# Altium PCB STM32F407_board.PcbDoc (part 1 of 3)
Units mm, origin at the board's own origin, x right, y up, seen from the top; angles counter-clockwise.
Board outline 72.6 x 74.6 mm, 4 copper layers (Top Layer, GND, PWR, Bottom Layer), stack 1.564 mm thick; 188 components, 143 nets, 738 pads, 406 vias.
Unrouted connection lines stored in the file: 4.
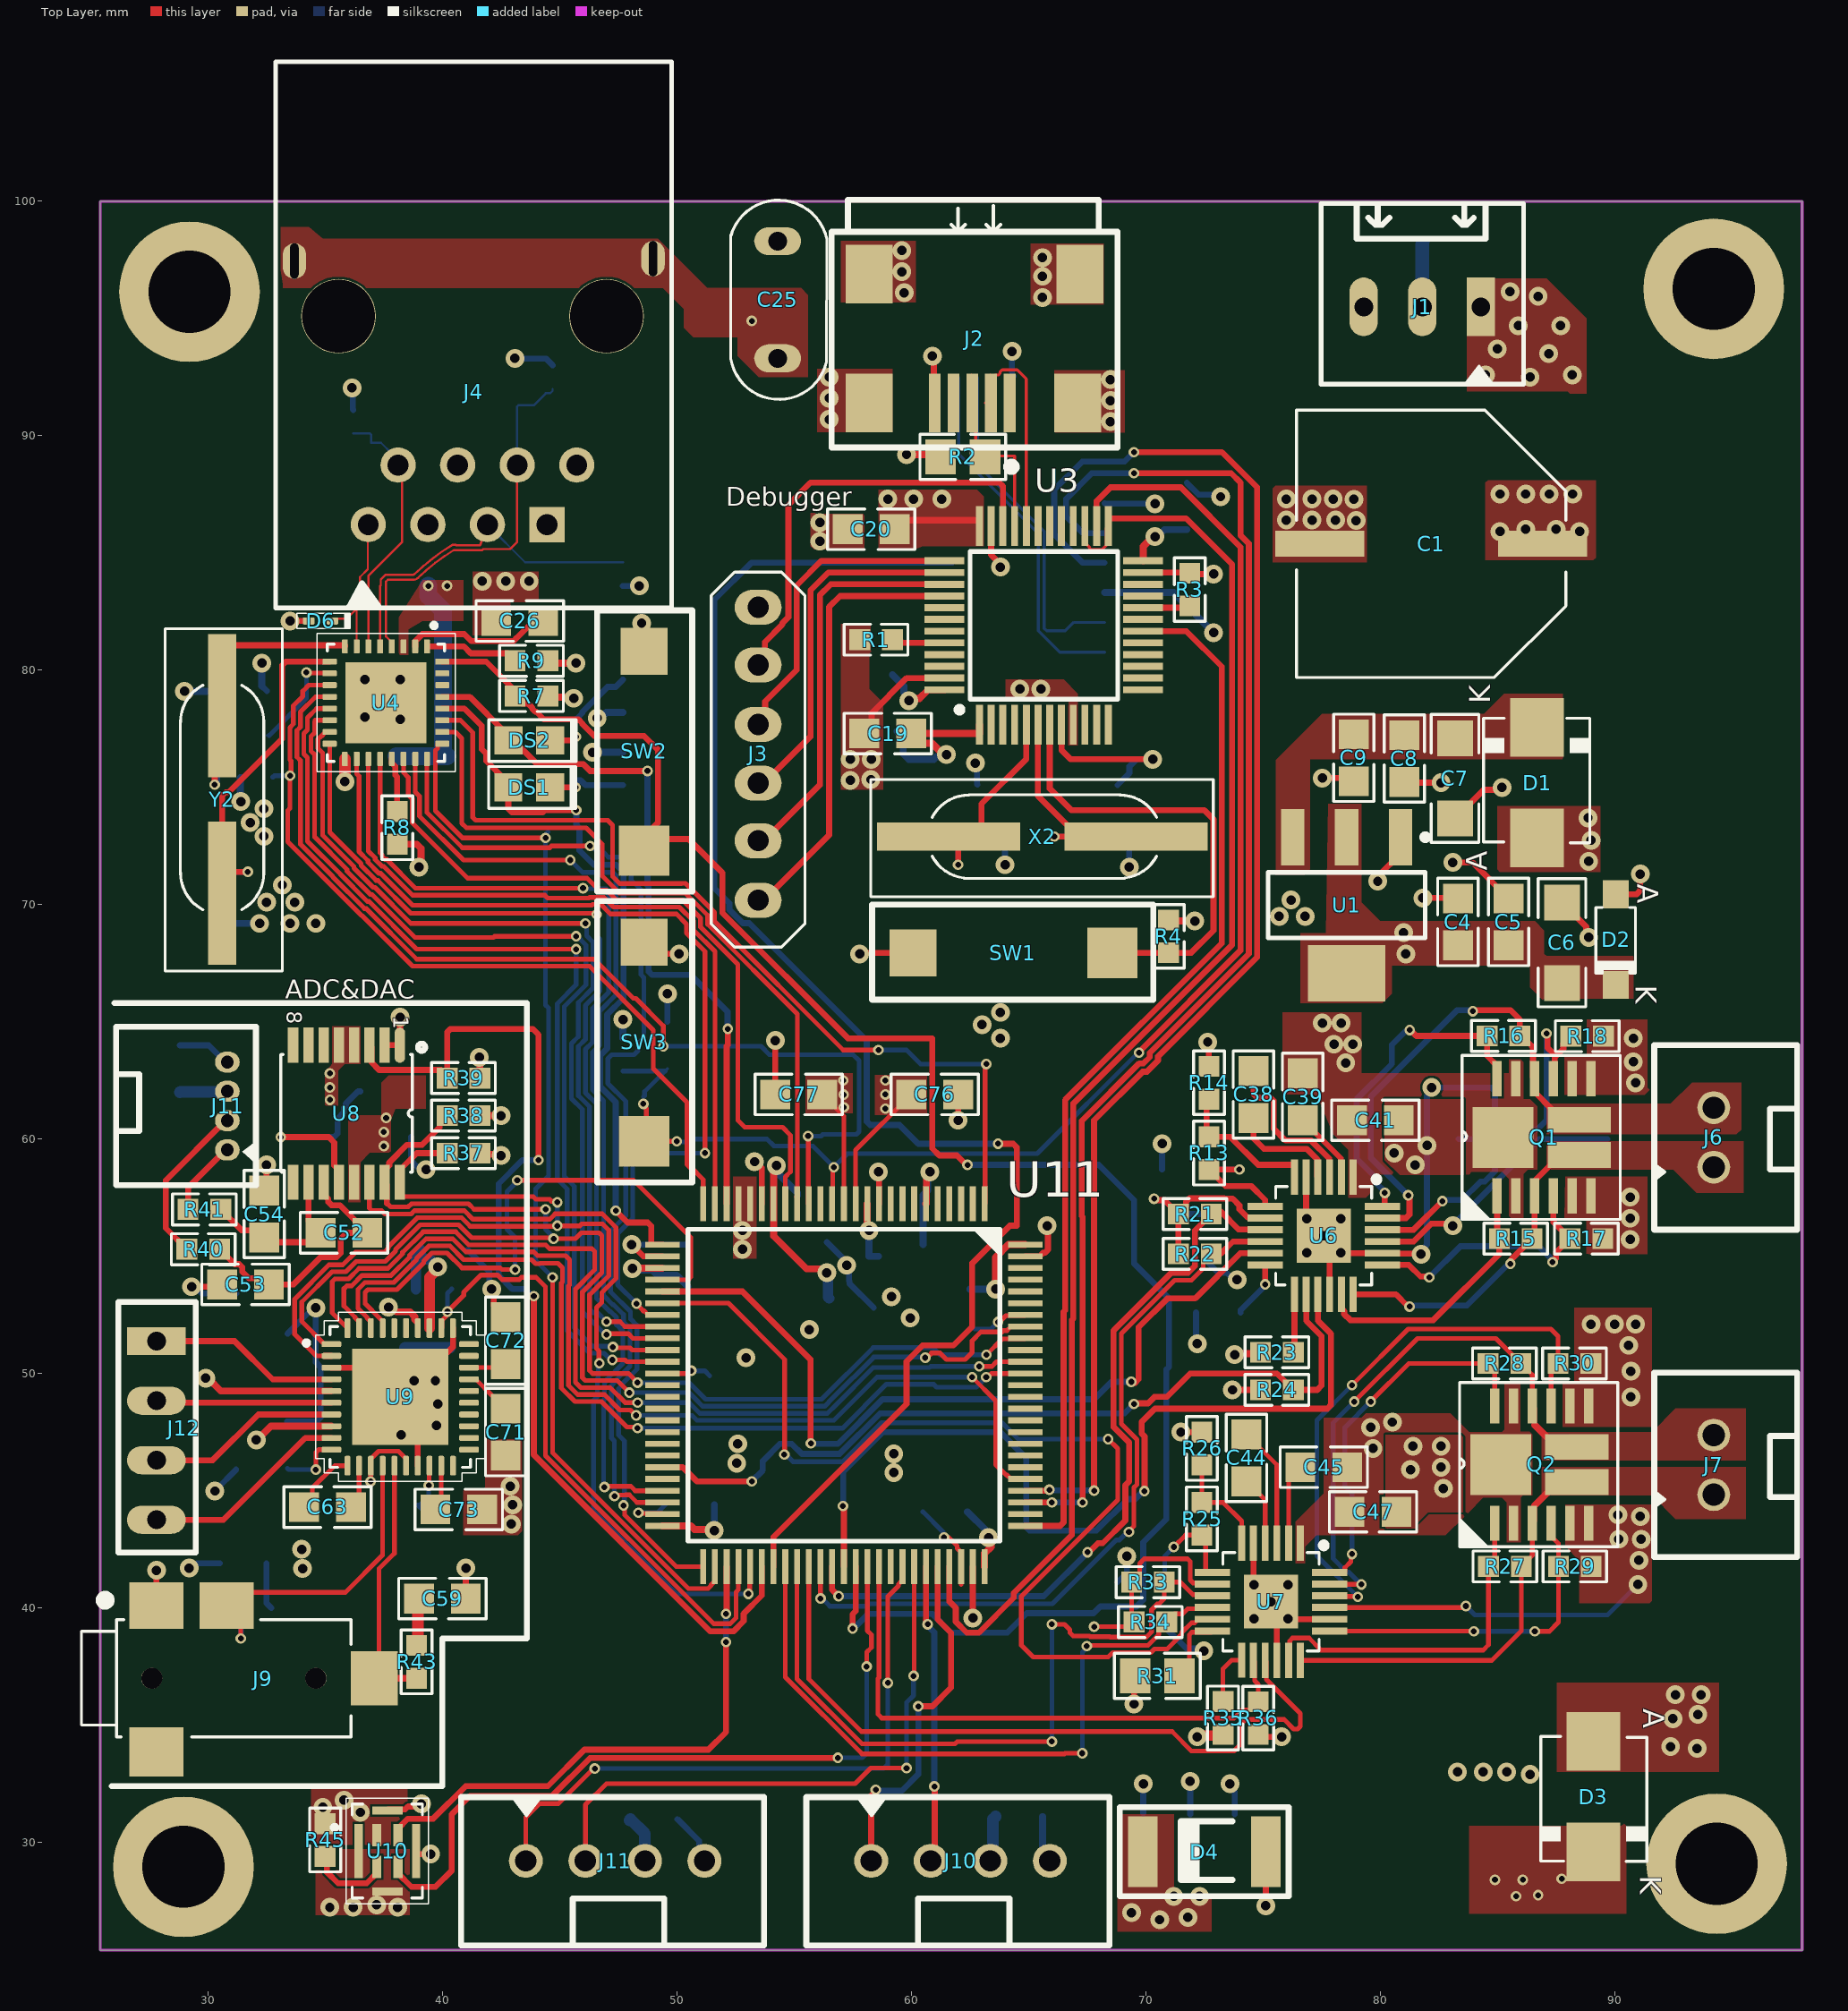
[diagram p0: Top Layer view]
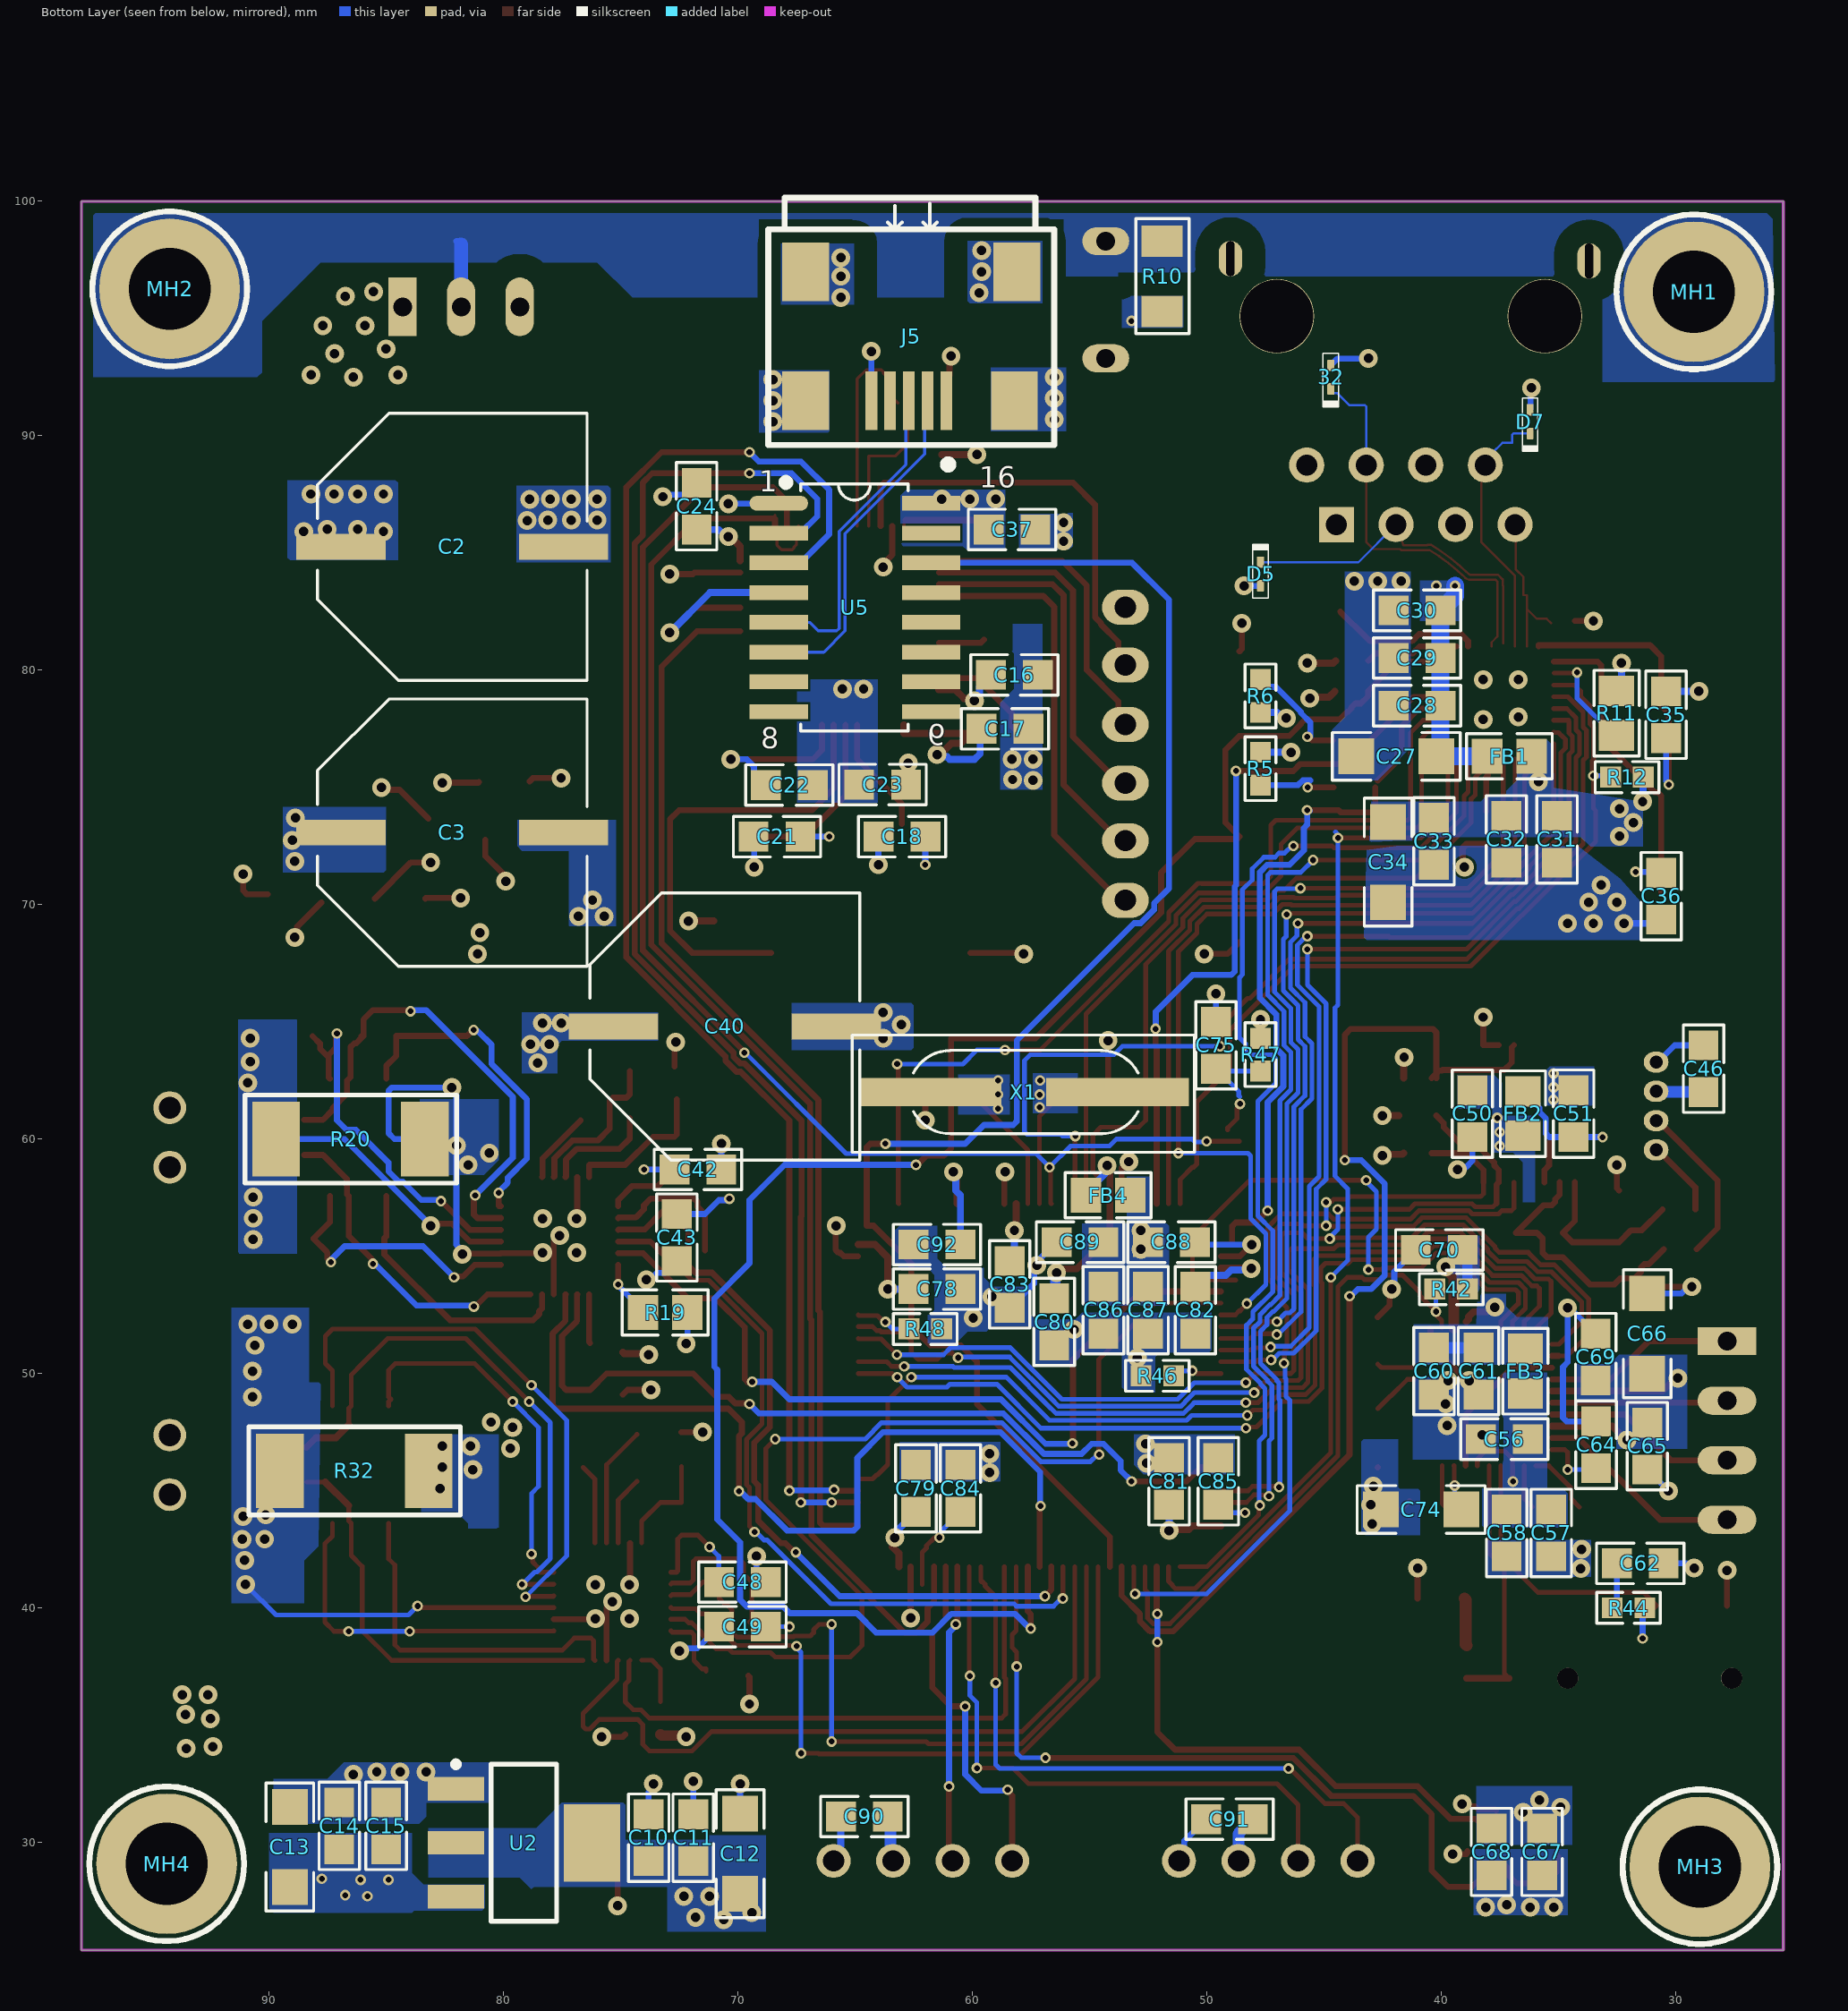
[diagram p1: Bottom Layer view, seen from below]
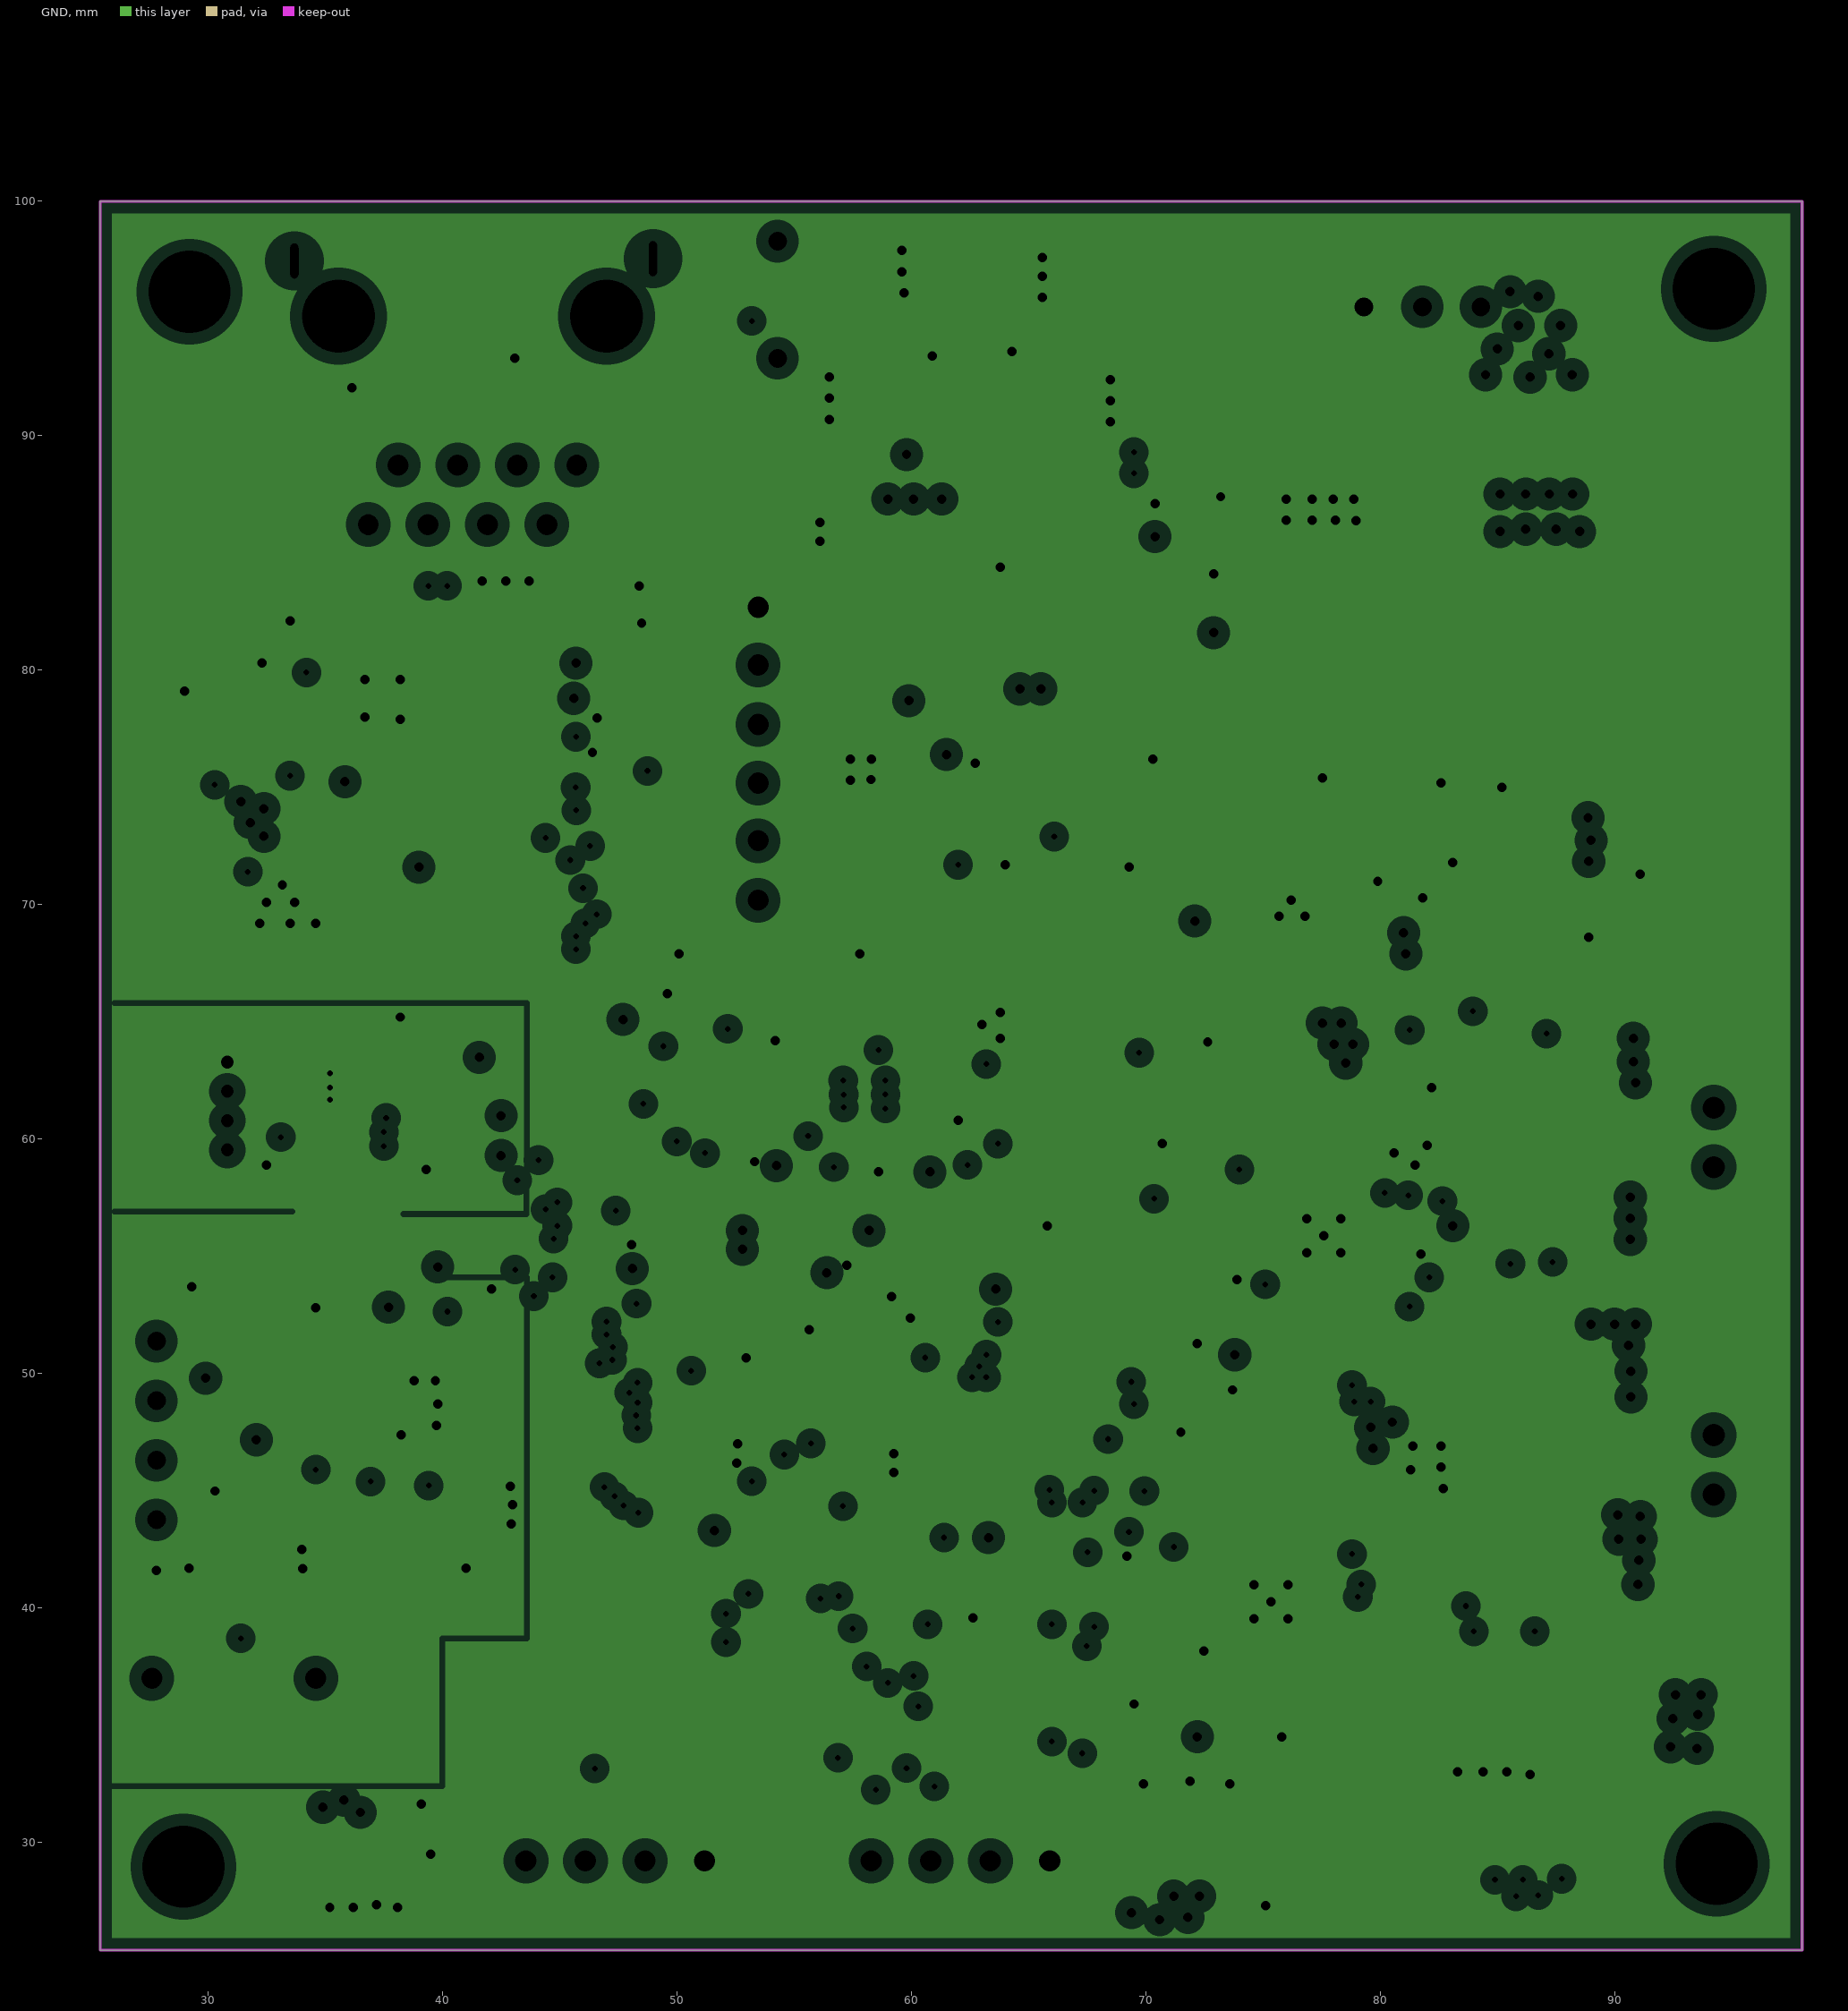
[diagram p2: GND, clearances drawn from the general rule]
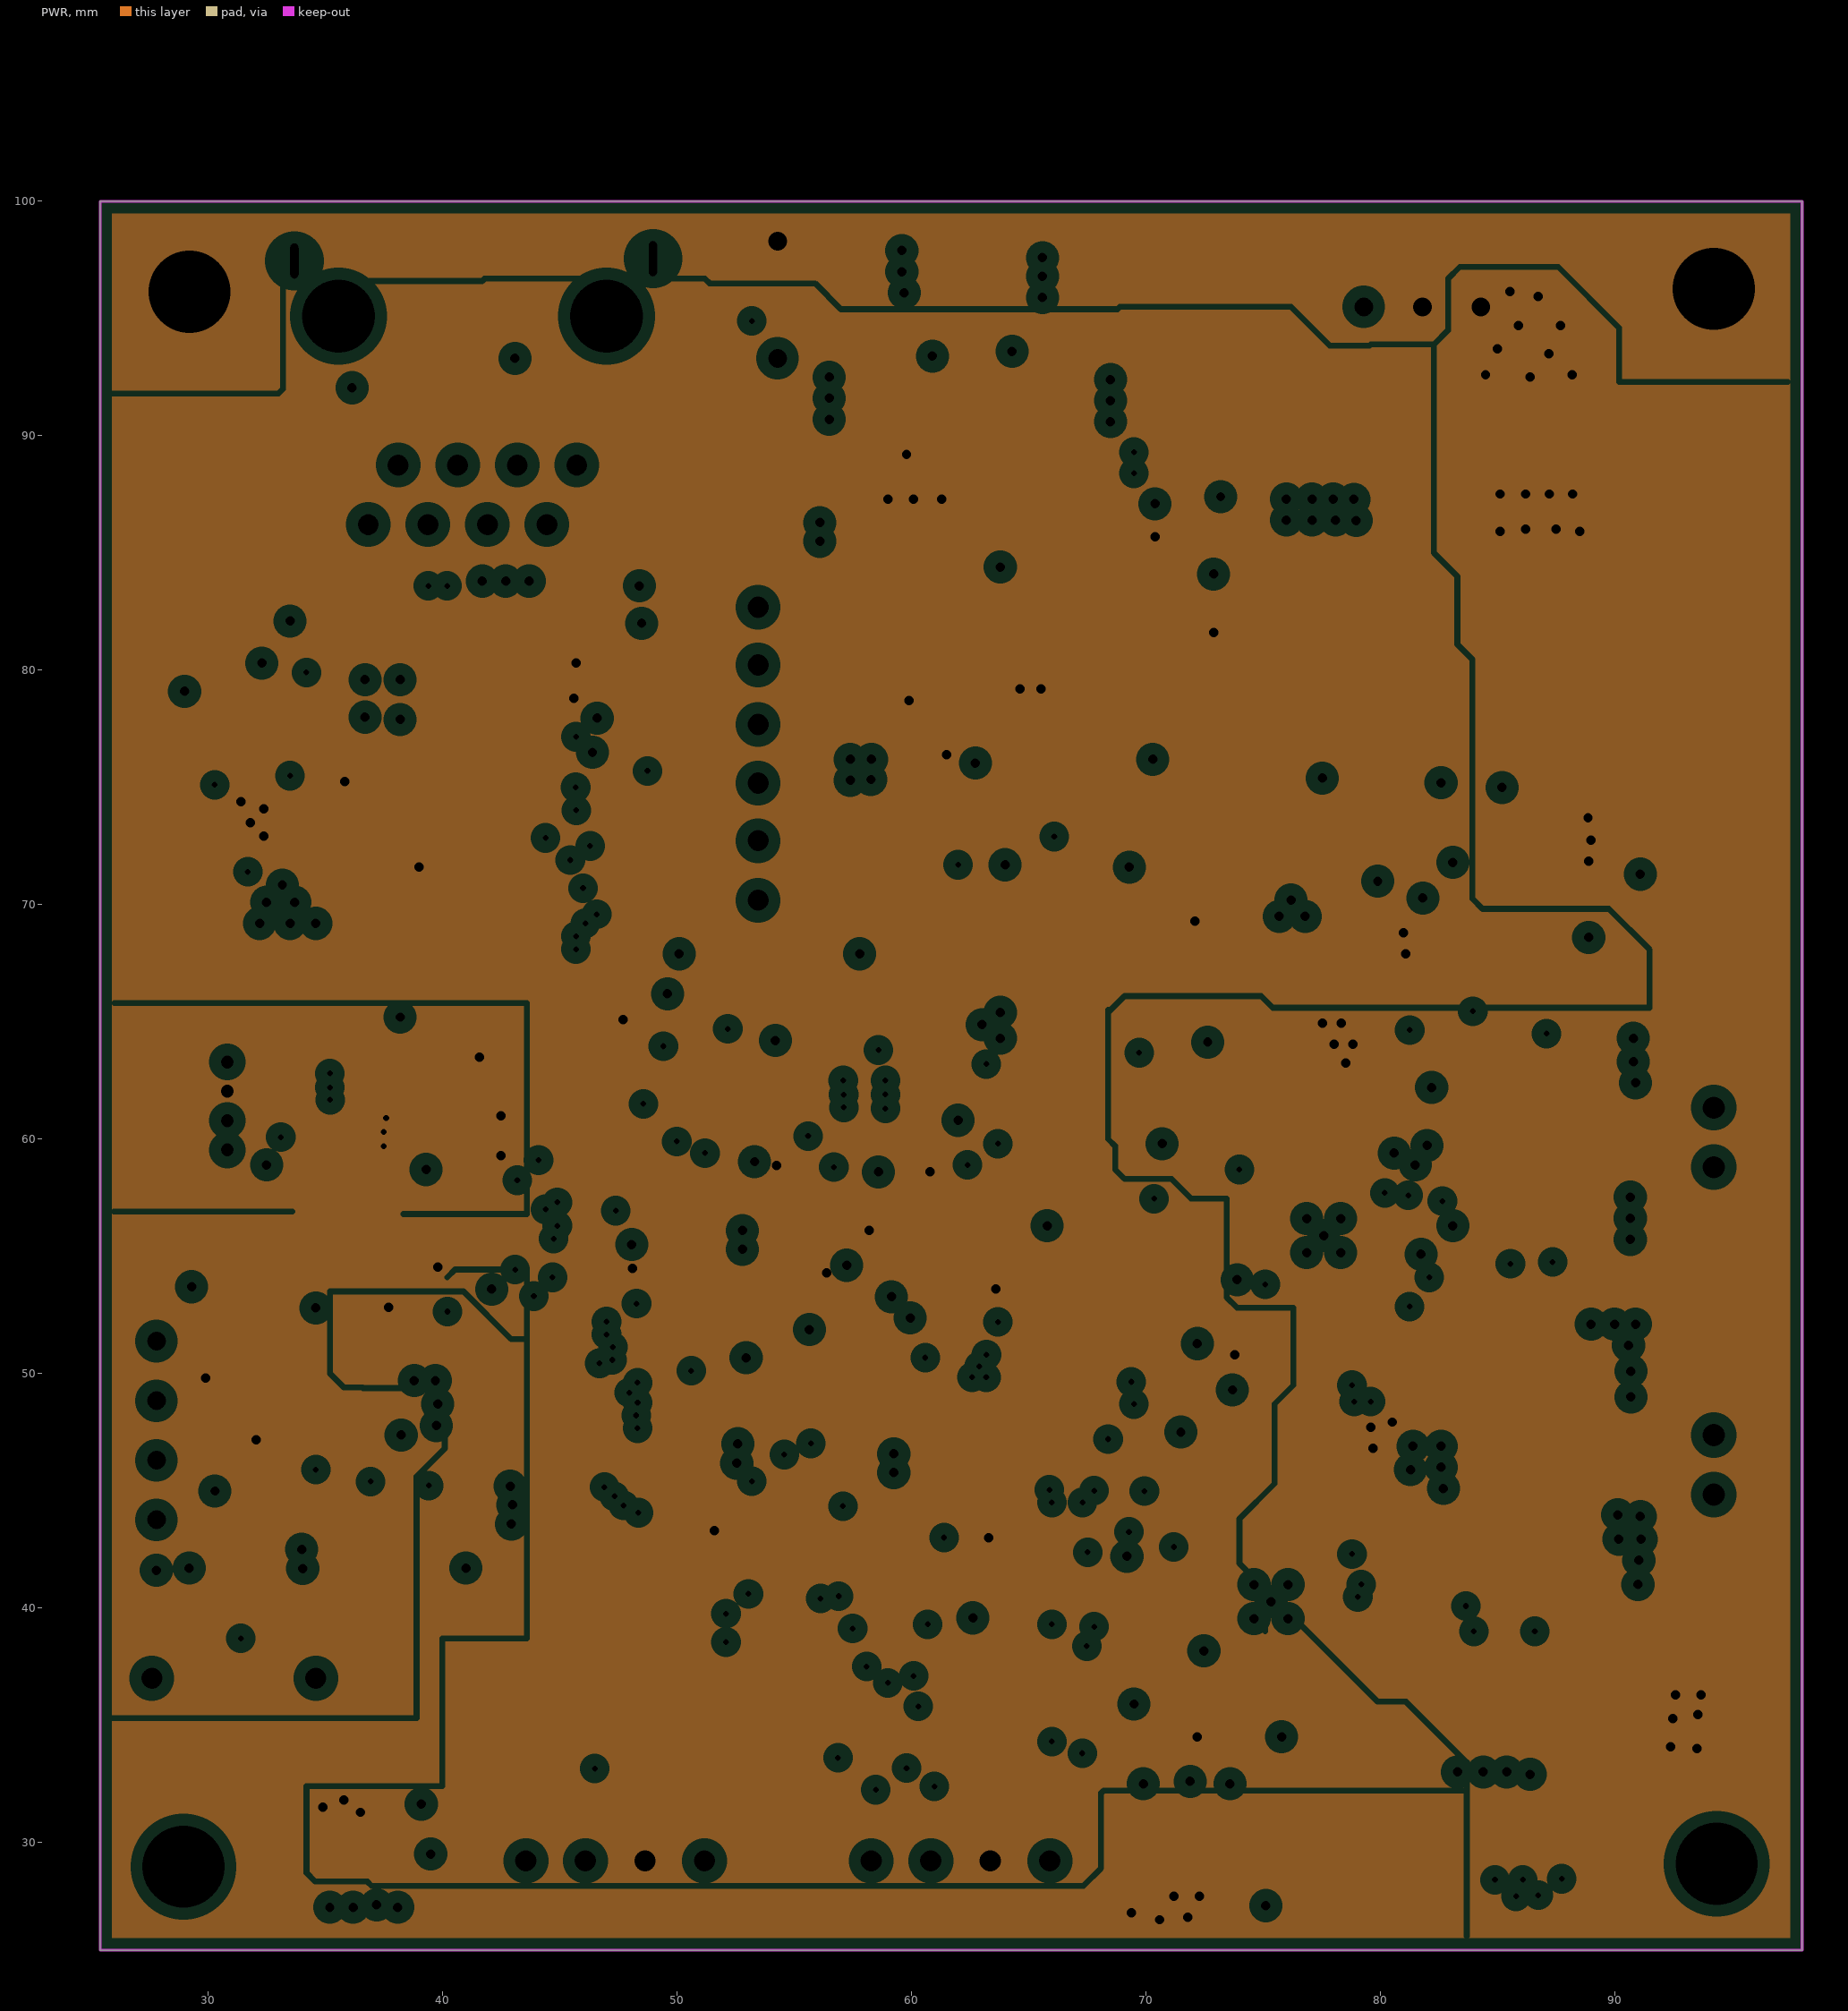
[diagram p3: PWR, clearances drawn from the general rule]
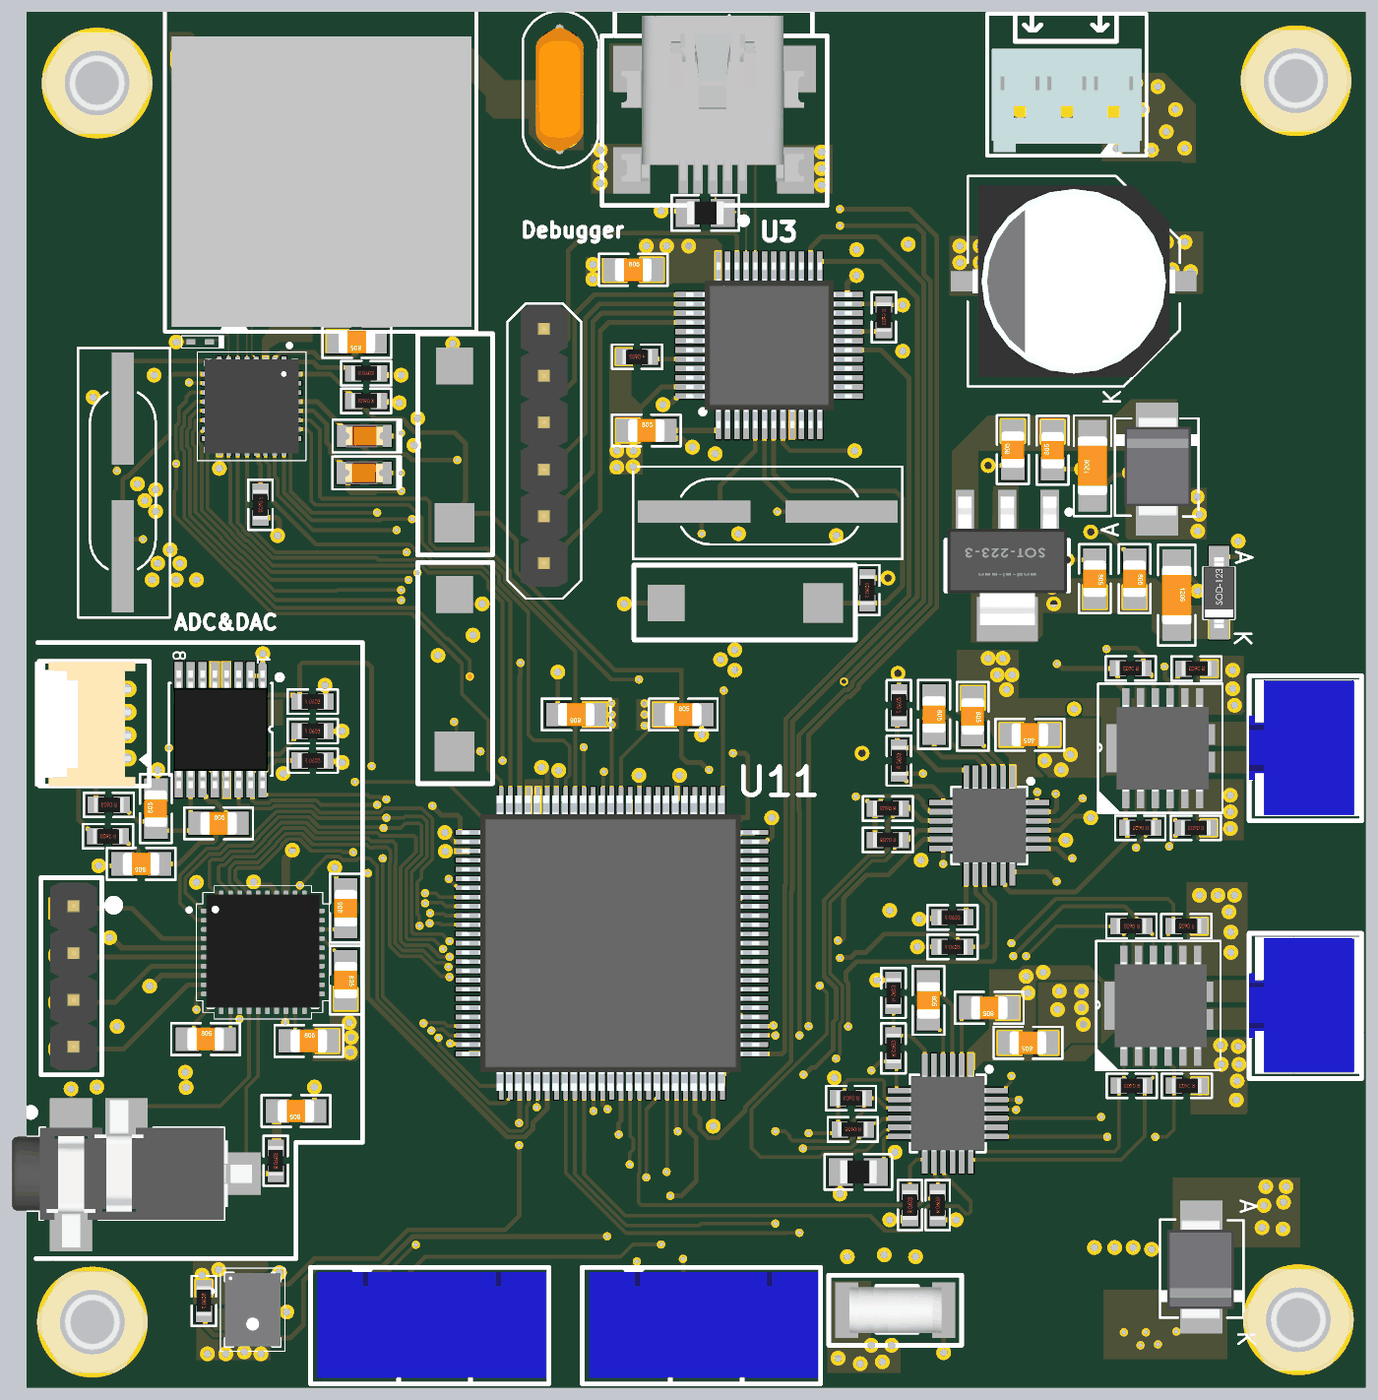
[diagram p6: 3D render of the assembled board from above, using the file's embedded part models]
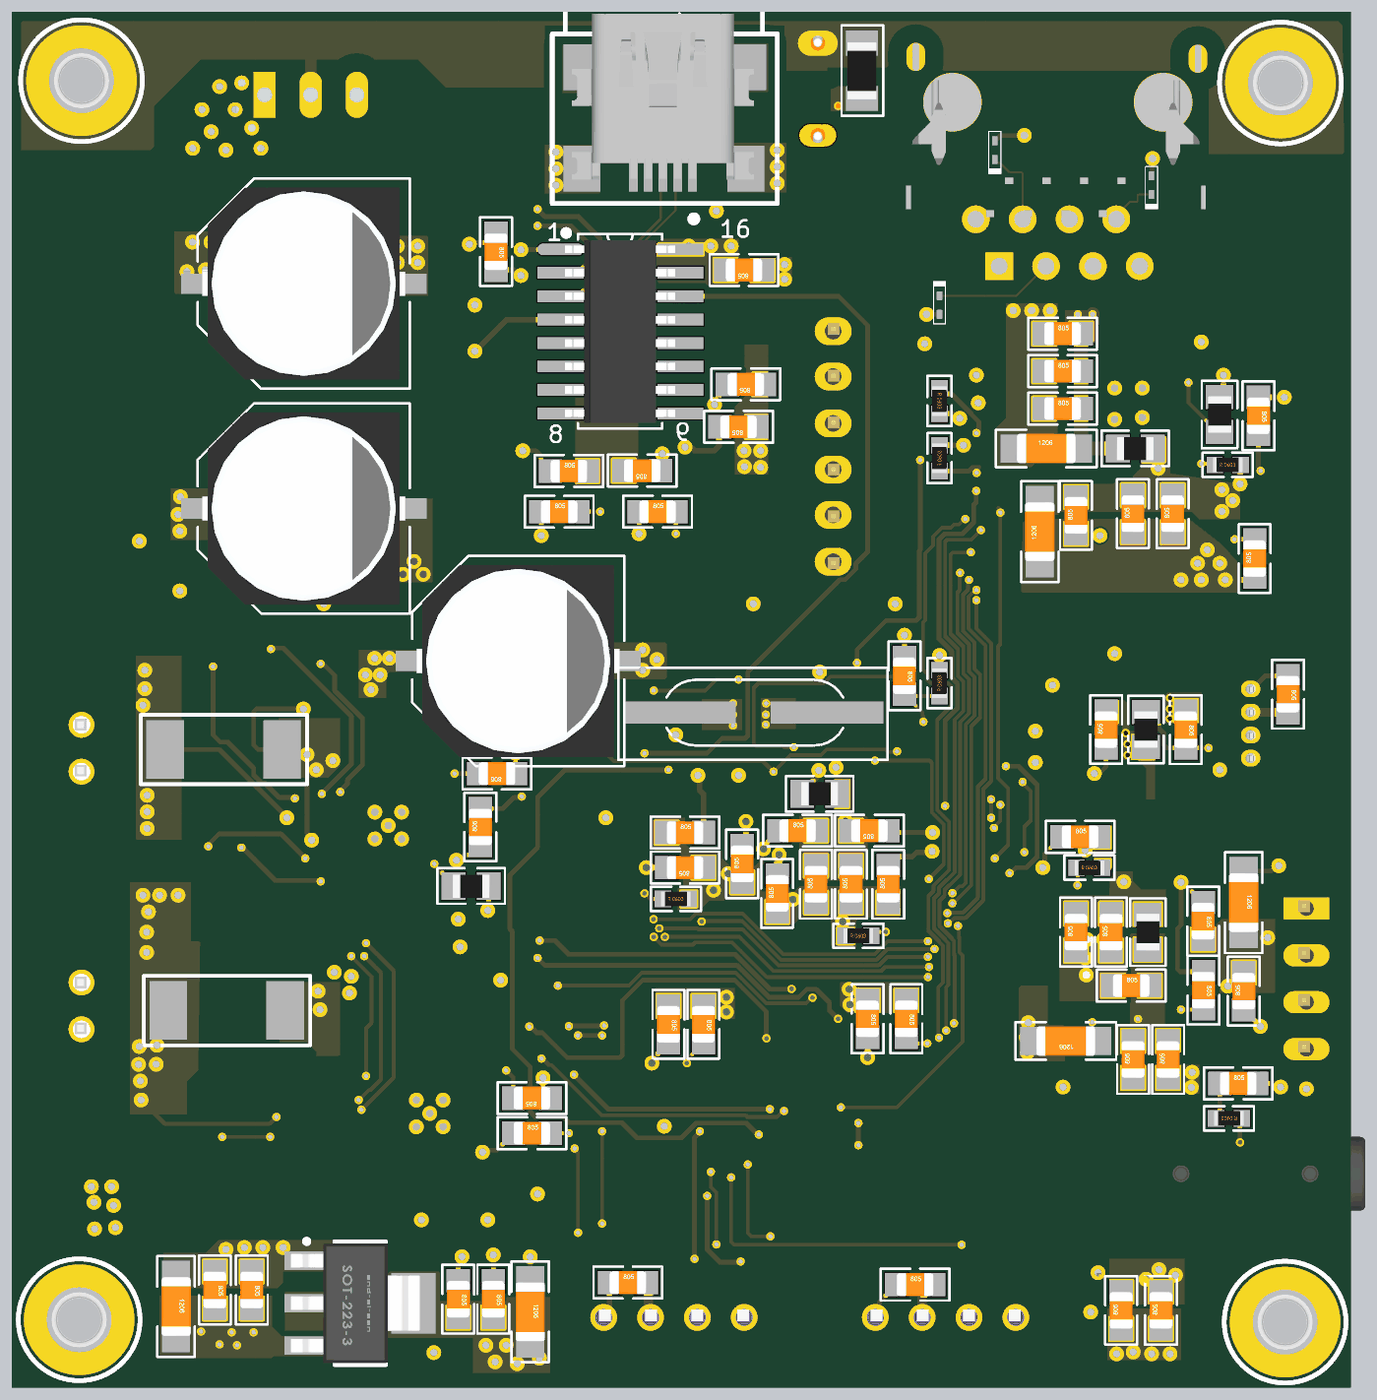
[diagram p7: 3D render of the assembled board from below, using the file's embedded part models]

## Layer stack, top to bottom
Top Solder: solder mask 0.0254, SM-001, Dk 4
Top Layer: signal copper 0.035
Dielectric 1: prepreg 0.0994, PP-017, Dk 4.1
GND: plane copper 0.0152, net GND
Dielectric 3: core 1.265, Core-039, Dk 4.8
PWR: plane copper 0.0152, net (Multiple Nets)
Dielectric 5: prepreg 0.0994, PP-017, Dk 4.1
Bottom Layer: signal copper 0.035
Bottom Solder: solder mask 0.0254, SM-001, Dk 4

## Board outline
25.4,25.4 98,25.4 98,100 25.4,100

## Design rules (kind name [scope] priority, off if disabled: settings)
Clearance Clearance_2 [InNet('EARTH_GND') vs InNet('GND')] p1: gap=1 ignorepadtopadclearanceinfootprint=TRUE
Clearance Clearance_1 [InNet('EARTH_GND') vs InNet('NetC25_2')] p2: gap=1 ignorepadtopadclearanceinfootprint=TRUE
Clearance [All] p3: gap=0.1 ignorepadtopadclearanceinfootprint=TRUE
DiffPairsRouting DIFF100 [InDifferentialPairClass('DIFF100')] p1: maxlimit=0.127 minlimit=0.127 mostfreqgap=0.127 toplayer_minwidth=0.092 toplayer_maxwidth=0.092 toplayer_prefwidth=0.092 bottomlayer_minwidth=0.092 bottomlayer_maxwidth=0.092 bottomlayer_prefwidth=0.092 impedanceprofiledriven=TRUE impedanceprofileid={A4477A5C-7D9D-4CBD-A29C-79324102BF78} impedanceprofilevalue=100.000000 maxuncoupledlength=12.7
DiffPairsRouting DIFF90 [InDifferentialPairClass('DIFF90')] p2: maxlimit=0.127 minlimit=0.127 mostfreqgap=0.127 toplayer_minwidth=0.125 toplayer_maxwidth=0.125 toplayer_prefwidth=0.125 bottomlayer_minwidth=0.125 bottomlayer_maxwidth=0.125 bottomlayer_prefwidth=0.125 impedanceprofiledriven=TRUE impedanceprofileid={9FFDC623-311C-4E26-8CAD-14C309DD6A7C} impedanceprofilevalue=90.000000 maxuncoupledlength=12.7
HoleSize [All] p1: absolutevalues=TRUE maxlimit=3.55 minlimit=0.025 maxpercent=80.000 minpercent=20.000
MinimumSolderMaskSliver [All] p1: minsoldermaskwidth=0.02
PlaneClearance [All] p1: clearance=0.508
PlaneConnect [All] p1: planeconnectstyle=Direct reliefexpansion=0.508 reliefentries=4 reliefconductorwidth=0.254 reliefairgap=0.254
PolygonConnect [All] p1: connectstyle=Direct reliefconductorwidth=0.254 reliefentries=4 polygonreliefangle="90 Angle" airgapwidth=0.254
RoutingVias [All] p1: holewidth=0.711 width=1.27 viastyle="Through Hole" minholewidth=0.25 minwidth=0.45 maxholewidth=0.711 maxwidth=1.27
SilkToSilkClearance [All] p1: silktosilkclearance=0.1
SilkToSolderMaskClearance [IsPad] p1: minsilkscreentomaskgap=0.05 clearancetoexposedcopper=TRUE
SolderMaskExpansion [All] p1: expansion=0 istentingtop=FALSE
SupplyNets "Schematic Supply Nets_2" [InNet('DVDD_2')] p1: voltage=0.000
SupplyNets "Schematic Supply Nets_7" [InNet('GND')] p2: voltage=0.000
SupplyNets "Schematic Supply Nets_6" [InNet('EARTH_GND')] p3: voltage=0.000
SupplyNets "Schematic Supply Nets_5" [InNet('+3V3')] p4: voltage=0.000
SupplyNets "Schematic Supply Nets_4" [InNet('+12V')] p5: voltage=0.000
SupplyNets "Schematic Supply Nets_1" [InNet('+1V8')] p6: voltage=0.000
SupplyNets "Schematic Supply Nets" [InNet('DVDD')] p7: voltage=0.000
Width [All] p1: maxlimit=5 minlimit=0.1 preferedwidth=0.254 minimp=50.000000 maximp=50.000000 favimp=50.000000
23 further rules are at their usual default settings.

## Classes and differential pairs
net class "Critical Nets": AIN0 AIN1 CH340_RST GND NetC52_1 NetC52_2 NetJ9_2 NetJ9_3 nFAULT nFAULT_2 NRST_F407 OUTA+ OUTA- OUTB+ OUTB- PHY_RST RESET RESET_DAC SNSOUT SNSOUT_2 SO SO_2
net class OSC_Nets: NetC18_2 NetC21_2 NetC76_1 NetC77_1
differential pair class DIFF100: RD TD
differential pair class DIFF90: CH340USB_D USB_D
component class Power: C1 C3 C4 C20 C26 C40 C48 C51 C56 C59 C68 C71 C72 C90 D1 D4 J1 MH2 MH3 U1 U2
component class Motor_Driver_2: C23 C48 C78 C87 C90 J10 Q2 R14 R15 R18 R22 R25 R28 R30 U7
component class Motor_Driver: C26 C40 C41 C42 C43 C48 J6 Q2 R3 R8 R14 R15 R18 R22 R25 U6
component class MCU_STM32F407: C31 C34 C43 C46 C51 C56 C61 C62 C64 C65 C68 C78 C81 C84 C87 C90 C92 FB3 J6 J10 R11 R44 R47 SW3 U5 X2
component class MCU_debugger: C1 C9 C16 C20 C23 C26 C41 C48 J2 J5 R3 R8 R40 R41 SW3 U2 X2
component class Ethernet_PHY: C3 C4 C13 C26 C31 C34 C37 C40 C42 C43 C51 C90 D4 D7 DS2 FB3 J4 J5 R8 R11 R37 R38 R41 R43 SW2 U2 U5 Y2
component class ADC_DAC: C3 C16 C30 C34 C37 C40 C46 C51 C56 C59 C61 C62 C64 C65 C68 C71 C74 C81 C84 C87 FB3 J1 J5 J6 R30 R38 R40 R41 R43 R44 R47 U1 U2 U6
differential pair USB_D: +USB_D_P -USB_D_N
differential pair TD: +TD_P -TD_N
differential pair RD: +RD_P -RD_N
differential pair CH340USB_D: +CH340USB_D_P -CH340USB_D_N

## Components (designator, comment, footprint, x,y, rotation, side; value= is the part's Value field where it differs from the comment)
32 "ESD3V3D9-TP" DIO_SOD-923 44.7,92.5 r90 bottom (schematic designator D8)
C1 "100uF" ACAP_P305_D393_H393_RAD 82.18,85.39 r180 top
C2 "100uF" ACAP_P305_D393_H393_RAD 82.18,85.263 r180 bottom
C3 "100uF" ACAP_P305_D393_H393_RAD 82.18,73.071 r180 bottom
C4 "0.1uF" CAP_0805 83.323,69.261 r270 top
C5 "1uF" CAP_0805 85.482,69.261 r270 top
C6 "10uF" CAP_1206 87.768,68.372 r270 top
C7 "10uF" CAP_1206 83.195,75.385 r90 top
C8 "1uF" CAP_0805 81.037,76.23 r90 top
C9 "0.1uF" CAP_0805 78.878,76.262 r90 top
C10 "0.1uF" CAP_0805 73.8,30.2 r270 bottom
C11 "1uF" CAP_0805 71.9,30.2 r270 bottom
C12 "10uF" CAP_1206 69.895,29.515 r270 bottom
C13 "10uF" CAP_1206 89.1,29.8 r270 bottom
C14 "1uF" CAP_0805 87,30.7 r270 bottom
C15 "0.1uF" CAP_0805 85,30.7 r270 bottom
C16 "4.7uF" CAP_0805 58.2,79.8 r0 bottom
C17 "0.1uF" CAP_0805 58.6,77.5 r0 bottom
C18 "30pF" CAP_0805 62.992,72.898 r180 bottom
C19 "0.1uF" CAP_0805 59,77.3 r0 top
C20 "0.1uF" CAP_0805 58.291,86.011 r0 top
C21 "30pF" CAP_0805 68.326,72.898 r180 bottom
C22 "1uF" CAP_0805 67.8,75.1 r180 bottom
C23 "10nF" CAP_0805 63.822,75.122 r0 bottom
C24 "0.1uF" CAP_0805 71.755,86.995 r270 bottom
C25 "10nF" CAP_P196_102X287_H332_RAD_TH 54.3,98.3 r270 top
C26 "2nF" CAP_0805 43.3,82.1 r180 top
C27 "10uF" CAP_1206 41.91,76.327 r180 bottom
C28 "1uF" CAP_0805 41.021,78.486 r180 bottom
C29 "0.1uF" CAP_0805 41.021,80.518 r180 bottom
C30 "10nF" CAP_0805 41.021,82.55 r180 bottom
C31 "10nF" CAP_0805 35.052,72.787 r90 bottom
C32 "0.1uF" CAP_0805 37.211,72.787 r90 bottom
C33 "1uF" CAP_0805 40.3,72.7 r90 bottom
C34 "10uF" CAP_1206 42.262,71.812 r90 bottom
C35 "20pF" CAP_0805 30.4,78.1 r270 bottom
C36 "20pF" CAP_0805 30.607,70.358 r90 bottom
C37 "0.1uF" CAP_0805 58.3,86 r0 bottom
C38 "0.1uF" CAP_0805 74.6,61.9 r270 top
C39 "1uF" CAP_0805 76.7,61.8 r270 top
C40 "100uF" ACAP_P305_D393_H393_RAD 70.55,64.8 r180 bottom
C41 "0.1uF" CAP_0805 79.8,60.8 r180 top
C42 "1uF" CAP_0805 71.7,58.7 r0 bottom
C43 "1uF" CAP_0805 72.6,55.8 r90 bottom
C44 "0.1uF" CAP_0805 74.3,46.4 r270 top
C45 "1uF" CAP_0805 77.6,46 r180 top
C46 "0.1uF" CAP_0805 28.8,63 r270 bottom
C47 "0.1uF" CAP_0805 79.7,44.1 r180 top
C48 "1uF" CAP_0805 69.8,41.1 r0 bottom
C49 "1uF" CAP_0805 69.8,39.2 r180 bottom
C50 "0.1uF" CAP_0805 38.664,61.084 r90 bottom
C51 "0.1uF" CAP_0805 34.346,61.084 r270 bottom
C52 "0.1uF" CAP_0805 35.8,56 r0 top
C53 "10nF" CAP_0805 31.6,53.8 r180 top
C54 "10nF" CAP_0805 32.4,56.8 r90 top
C56 "0.1uF" CAP_0805 37.3,47.2 r180 bottom
C57 "0.1uF" CAP_0805 35.3,43.2 r90 bottom
C58 "1uF" CAP_0805 37.2,43.2 r90 bottom
C59 "22nF" CAP_0805 40,40.4 r180 top
C60 "1uF" CAP_0805 40.3,50.1 r90 bottom
C61 "0.1uF" CAP_0805 38.4,50.1 r90 bottom
C62 "22nF" CAP_0805 31.5,41.9 r180 bottom
C63 "1uF" CAP_0805 35.1,44.3 r0 top
C64 "1uF" CAP_0805 33.384,46.959 r270 bottom
C65 "0.1uF" CAP_0805 31.2,46.9 r90 bottom
C66 "10uF" CAP_1206 31.2,51.7 r270 bottom
C67 "1uF" CAP_0805 35.687,29.591 r90 bottom
C68 "0.1uF" CAP_0805 37.846,29.591 r90 bottom
C69 "0.1uF" CAP_0805 33.4,50.7 r270 bottom
C70 "0.1uF" CAP_0805 40.073,55.271 r180 bottom
C71 "150pF" CAP_0805 42.7,47.5 r270 top
C72 "150pF" CAP_0805 42.7,51.4 r90 top
C73 "1uF" CAP_0805 40.7,44.2 r0 top
C74 "10uF" CAP_1206 40.849,44.195 r0 bottom
C75 "0.1uF" CAP_0805 49.6,64 r270 bottom
C76 "30pF" CAP_0805 61,61.9 r0 top
C77 "30pF" CAP_0805 55.2,61.9 r180 top
C78 "4.7uF" CAP_0805 61.5,53.6 r0 bottom
C79 "0.1uF" CAP_0805 62.4,45.1 r270 bottom
C80 "0.1uF" CAP_0805 56.5,52.2 r90 bottom
C81 "0.1uF" CAP_0805 51.6,45.4 r270 bottom
C82 "0.1uF" CAP_0805 50.477,52.7 r90 bottom
C83 "0.1uF" CAP_0805 58.4,53.8 r90 bottom
C84 "2.2uF" CAP_0805 60.5,45.1 r270 bottom
C85 "2.2uF" CAP_0805 49.5,45.4 r270 bottom
C86 "1uF" CAP_0805 54.4,52.7 r90 bottom
C87 "1uF" CAP_0805 52.5,52.7 r90 bottom
C88 "0.1uF" CAP_0805 51.5,55.6 r0 bottom
C89 "0.1uF" CAP_0805 55.4,55.6 r180 bottom
C90 "0.1uF" CAP_0805 64.6,31.1 r180 bottom
C91 "0.1uF" CAP_0805 49.022,30.988 r180 bottom
C92 "0.1uF" CAP_0805 61.5,55.5 r180 bottom
D1 "MBRS130LT3G" DIO_SMB_DO-214AA 86.7,75.2 r90 top
D2 "BZT52C3V3-7-F" DIO_SOD-123 90.054,68.499 r270 top
D3 "MBRS130LT3G" DIO_SMB_DO-214AA 89.1,31.95 r270 top
D4 "1.8V Zener" DIO_DO-213AB_SMD 72.5,29.6 r0 top
D5 "ESD3V3D9-TP" DIO_SOD-923 47.7,84.1 r270 bottom
D6 "ESD3V3D9-TP" DIO_SOD-923 34.8,82.1 r180 top
D7 "ESD3V3D9-TP" DIO_SOD-923 36.2,90.6 r90 bottom
DS1 "RED LED" LED_0805 43.7,75 r180 top
DS2 "RED LED" LED_0805 43.711,77 r180 top
FB1 "1K" IND_0805 37.084,76.327 r180 bottom
FB2 "1K" IND_0805 36.505,61.084 r270 bottom
FB3 "1K" IND_0805 36.4,50.1 r90 bottom
FB4 "1K" IND_0805 54.2,57.6 r0 bottom
J1 "Terminal Block 2.5mm" CON3_100_TB_TH_ST 81.8,95.5 r270 top
J2 "USB2.0 MINI B" CON_690-005-299-043 58.2,91.4 r270 top
J3 "Bergstrip 2.54mm" CON6_100_59D78_TH_ST 53.467,70.184 r90 top
J4 "RJ45 LAN" CON10_P106_RJ45_TH_ST 46.985,95.155 r180 top
J5 "USB2.0 MINI B" CON_690-005-299-043 67.1,91.5 r270 bottom
J6 "B2B-XH-A(LF)(SN)" CON2_100_B2B-XH-A_TH_ST 94.234,58.801 r90 top
J7 "B2B-XH-A(LF)(SN)" CON2_100_B2B-XH-A_TH_ST 94.234,44.831 r90 top
J9 "4X1 STEREO" CON_SJ-2504A-SMT-TR_SMD 31.1,37 r0 top
J10 "B4B-XH-A(LF)(SN)" CON4_100_B4B-XH-A_TH_ST 58.293,29.21 r0 top
J11 "1.25MM Spade 4PIN" CON4_50_653004117322_TH_RA 30.826,63.284 r90 top
J11 "B4B-XH-A(LF)(SN)" CON4_100_B4B-XH-A_TH_ST 43.561,29.21 r0 top
J12 "4X1 BERG STRIP" CON4_100_40D72_TH_ST_MALE 27.8,51.38 r0 top
MH1 "Mounting Hole" MOUNTING 29.21,96.139 r180 bottom
MH2 "Mounting Hole" MOUNTING 94.234,96.266 r180 bottom
MH3 "Mounting Hole" MOUNTING 28.956,28.956 r180 bottom
MH4 "Mounting Hole" MOUNTING 94.361,29.083 r180 bottom
Q1 "DMHT6016LFJ-13" DFN5045-12_33_212_27X15_SMD_1 86.995,60.071 r0 top
Q2 "DMHT6016LFJ-13" DFN5045-12_33_212_27X15_SMD_1 86.892,46.113 r0 top
R1 "100K" RES_0603 58.5,81.3 r180 top
R2 "1.5K" RES_0805 62.2,89.1 r0 top
R3 "100K" RES_0603 71.882,83.439 r270 top
R4 "10K" RES_0603 70.981,68.643 r90 top
R5 "3K3" RES_0603 47.7,75.8 r90 bottom
R6 "3K3" RES_0603 47.7,78.9 r270 bottom
R7 "10K" RES_0603 43.8,78.9 r180 top
R8 "10K" RES_0603 38.075,73.276 r270 top
R9 "10K" RES_0603 43.8,80.4 r0 top
R10 "1M" RES_1206 51.9,96.8 r90 bottom
R11 "6.49K" RES_0805 32.512,78.166 r90 bottom
R12 "10K" RES_0603 32.068,75.438 r180 bottom
R13 "2.2K" RES_0603 72.7,59.398 r90 top
R14 "3K3" RES_0603 72.7,62.401 r90 top
R15 "10K" RES_0603 85.789,55.753 r180 top
R16 "10K" RES_0603 85.264,64.4 r180 top
R17 "10K" RES_0603 88.8,55.753 r180 top
R18 "10K" RES_0603 88.836,64.389 r180 top
R19 "33K" RES_0805 73.1,52.6 r180 bottom
R20 "50mOHM" RES_2512 86.525,60 r0 bottom
R21 "10K" RES_0603 72.1,56.8 r180 top
R22 "10K" RES_0603 72.1,55.1 r180 top
R23 "10K" RES_0603 75.6,50.9 r0 top
R24 "10K" RES_0603 75.6,49.3 r0 top
R25 "2.2K" RES_0603 72.4,43.8 r90 top
R26 "3K3" RES_0603 72.4,46.8 r90 top
R27 "10K" RES_0603 85.325,41.771 r180 top
R28 "10K" RES_0603 85.308,50.427 r180 top
R29 "10K" RES_0603 88.31,41.771 r180 top
R30 "10K" RES_0603 88.292,50.427 r180 top
R31 "33K" RES_0805 70.5,37.1 r180 top
R32 "50mOHM" RES_2512 86.36,45.847 r0 bottom
R33 "10K" RES_0603 70.1,41.1 r180 top
R34 "10K" RES_0603 70.2,39.4 r180 top
R35 "10K" RES_0603 73.3,35.301 r90 top
R36 "10K" RES_0603 74.8,35.3 r90 top
R37 "10K" RES_0603 40.9,59.4 r0 top
R38 "10K" RES_0603 40.9,61 r0 top
R39 "100K" RES_0603 40.9,62.6 r0 top
R40 "1K" RES_0603 29.8,55.3 r180 top
R41 "1K" RES_0603 29.846,57 r180 top
R42 "10K" RES_0603 39.569,53.6 r180 bottom
R43 "51.1R" RES_0603 38.9,37.698 r90 top
R44 "51.1R" RES_0603 32.001,40 r0 bottom
R45 "10K" RES_0603 35,30.1 r90 top
R46 "100K" RES_0603 52.1,49.9 r180 bottom
R47 "10K" RES_0603 47.7,63.6 r90 bottom
R48 "100K" RES_0603 62,51.9 r180 bottom
SW1 "TACTILE SWITCH" SW_342_SMD 60.08,67.945 r180 top
SW2 "TACTILE SWITCH" SW_342_SMD 48.6,80.8 r90 top
SW3 "TACTILE SWITCH" SW_342_SMD 48.6,68.4 r90 top
U1 "LD1117S33CTR" SOT223_3 78.6,70 r270 top
U2 "LD1117S33CTR" SOT223_3 79.148,30.007 r180 bottom
U3 "STM32F103C8T6" LQFP-48_19.6_393_58X11_SMD 65.659,81.915 r90 top
U4 "DP83826IRHBR" VQFN32_19_218_23X9_SMD 37.592,78.613 r270 top
U5 "CH340C" SOIC16_50_284_25X90_SMT 65,82.7 r180 bottom
U6 "DRV8701ERGET" VFQFN24_19.6_196_12X32_SMD_1 75.597,57.13 r270 top
U7 "DRV8701ERGET" VFQFN24_19.6_196_12X32_SMD_1 73.348,41.517 r270 top
U8 "ADS122C04IPW" TSSOP16_25-59_294_54X14_SMT 35.912,61.097 r270 top
U9 "CS43L22-CNZ" QFN40_19_284_33X9_SMD 38.2,49 r0 top
U10 "IMP34DT05TR" HCLGA-4_53_137_15X37_SMD 37.65,29.631 r0 top
U11 "STM32F407VGT6" QFN100_19.6_669_58X10_SMD 57,49.5 r270 top
X1 "8Mhz" XTAL_314_240X47_SMD 53.8,62 r0 bottom
X2 "8Mhz" XTAL_314_240X47_SMD 69.595,72.898 r180 top
Y2 "25Mhz -14mm" XTAL_314_240X47_SMD 30.607,78.486 r270 top

## Footprints (in the part's own frame and the unit in brackets; to place one, negate y for a bottom-side part, rotate by r counter-clockwise, add the part's x,y. Pads: shape width x height; smd on the part's side, far side on the other; paste and mask are expansions set on the pad)
ACAP_P305_D393_H393_RAD [mm] "Aluminium Capacitor"
  rect 3.81x1.1 smd: 1(-4.75,0) 2(4.75,0)
  silkscreen extent -5.75,-5.7 5.75,5.7, body extent -5.5,-5.2 5.5,5.2, height 10.41
CAP_0805 [mm] "Ceramic Capacitor"
  rect 1.27x1.27 smd mask+0.076: 1(-1,0) 2(1,0)
  silkscreen extent -1.86,-0.86 1.86,0.86, body extent -1,-0.62 1,0.63, height 0.78
CAP_1206 [mil] "Ceramic Capacitor"
  rect 60x60 smd: 1(-67.49,-0.2) 2(67.51,-0.2)
  silkscreen extent -107,-40 108,40, body extent -63,-31 63,32, height 39
CAP_P196_102X287_H332_RAD_TH [mm] "Y1 CAP, TROUGH HOLE"
  oval 1.2x2 hole 0.8 mask+0.076: 1(0,0) 2(5,0)
  silkscreen extent -1.75,-2 6.75,2.1, body extent -1.04,-1.3 6.04,1.3, height 9.14
CON2_100_B2B-XH-A_TH_ST [mm] "Connector Header"
  round 1.4 hole 0.94: 1(0,0) 2(2.54,0)
  silkscreen extent -2.67,-3.56 5.21,2.54, body extent -2.41,-3.5 5.01,2.54, height 8.44
CON3_100_TB_TH_ST [mm]
  rect 2.5x1.2 hole 0.8: 1(0,2.5)
  oval 2.5x1.2 hole 0.8: 2(0,0) 3(0,-2.5)
  silkscreen extent -4.4,-4.32 3.3,4.32, body extent -2.5,-4.07 3.1,4.07, height 12.86
CON4_50_653004117322_TH_RA [mm] "wurth connector"
  oval 0.9x1.05 hole 0.55: 1(-3.75,0) 2(-2.5,0) 3(-1.25,0) 4(0,0)
  silkscreen extent -5.25,-1.34 1.5,4.75, body extent -5.27,-0.45 1.48,4.98, height 3.65
CON4_100_40D72_TH_ST_MALE [mm] "Berg Strip"
  rect 2.5x1.2 hole 0.8: 1(0,0)
  oval 2.5x1.2 hole 0.8: 2(0,-2.54) 3(0,-5.08) 4(0,-7.62)
  round 1.016 on Top Overlay: ""(2.311,0.178)
  silkscreen extent -1.63,-9.02 1.68,1.68, body extent -1.14,-8.76 1.4,1.4, height 8.55
CON4_100_B4B-XH-A_TH_ST [mm] "Connector Header"
  round 1.45 hole 0.91: 1(0,0) 2(2.54,0) 3(5.08,0) 4(7.62,0)
  silkscreen extent -2.77,-3.61 10.16,2.72, body extent -2.4,-3.28 10,2.48, height 8.32
CON6_100_59D78_TH_ST [mm] "Bergstrip"
  oval 1.5x2 hole 0.9: 1(0,0) 2(2.54,0) 3(5,0) 4(7.5,0) 5(10.04,0) 6(12.5,0)
  silkscreen extent -2,-2 14,2, body extent -1.35,-1.24 13.89,1.3, height 8.55
CON10_P106_RJ45_TH_ST [mm] "LAN Connector"
  round 1.5 hole 0.89 paste-2539.97 mask+0: 1(10.145,8.945) 2(8.875,6.405) 3(7.605,8.945) 4(6.335,6.405) 5(5.065,8.945) 6(3.795,6.405) 8(1.255,6.405)
  rect 1.5x1.5 hole 0.89 paste-2539.97 mask+0: 7(2.525,8.945)
  oval 1x1.524 hole 1.5 slot 0.35 at 0 deg: 9(13.3,-2.3) 10(-2,-2.4)
  round 3.18 hole 3.12 unplated paste-2539.97 mask+0: ""(-0.015,0.055) ""(11.415,0.055)
  silkscreen extent -2.79,-10.8 14.1,12.5, body extent -2.53,-3.5 13.73,12.25, height 13.04
CON_690-005-299-043 [mm] "USB MINI-B"
  rect 2.5x0.5 smd: 1(0,6) 2(0,5.2) 3(0,4.4) 4(0,3.6) 5(0,2.8)
  rect 2.5x2 smd: 6(-5.5,9) 6(-5.5,0) 6(0,8.9) 6(0,0)
  silkscreen extent -8.66,-1.6 2.88,10.6, body extent -8.4,-0.55 0.6,9.35, height 3.96
CON_SJ-2504A-SMT-TR_SMD [mm]
  rect 2.3x2 smd: 1(-3.3,3.1) 3(-0.3,3.1)
  rect 2x2.3 smd: 2(6,0)
  rect 2.3x2.1 smd: 4(-3.3,-3.15)
  round 0.9 hole 0.9 unplated: ""(-3.5,0) ""(3.5,0)
  silkscreen extent -6.5,-2.5 5,3.53, body extent -6.5,-4 6.5,4, height 4.01
DFN5045-12_33_212_27X15_SMD_1 [mm] "CASE: DFN5045"
  rect 0.4x1.5 smd: 1(-2,-2.5) 2(-1.2,-2.5) 3(-0.4,-2.5) 4(0.4,-2.5) 5(1.2,-2.5) 6(2,-2.5) 7(2,2.5) 8(1.2,2.5) 9(0.4,2.5) 10(-0.4,2.5) 11(-1.2,2.5) 12(-2,2.5)
  rect 2.7x1.1 smd: 13(1.5,-0.75) 14(1.5,0.75)
  rect 2.6x2.6 smd: 15(-1.75,0)
  silkscreen extent -3.5,-3.5 3.25,3.5, body extent -2.5,-2.36 2.5,2.36, height 0.9
DIO_DO-213AB_SMD [mm] "Diode"
  rect 1.25x3 smd: A(2.625,0) K(-2.625,0)
  silkscreen extent -3.61,-1.9 3.6,1.9, body extent -2.49,-1.25 2.51,1.25, height 2.75
DIO_SMB_DO-214AA [mm] "Diode"
  rect 2.5x2.3 smd: A(-2.35,0) K(2.354,0)
  silkscreen extent -2.56,-2.25 2.75,2.29, body extent -2.56,-1.84 2.84,1.76, height 2.27
DIO_SOD-123 [mm] "DIODE GEN PURP"
  rect 1.2x1.1 smd mask+0.076: A(-1.937,0.006) K(1.923,0.006)
  silkscreen extent -1.38,-0.84 1.44,0.86, body extent -1.92,-0.84 1.92,0.86, height 1.43
DIO_SOD-923 [mm]
  rrect25% 0.49x0.3 smd: A(0.505,0) K(-0.505,0)
  silkscreen extent -1.27,-0.33 1.02,0.33
HCLGA-4_53_137_15X37_SMD [mm]
  rect 0.4x0.95 smd: 1(-0.45,0.675) 2(-0.45,-0.675) 3(0.45,-0.675) 4(0.45,0.675)
  rect 0.35x2.3 smd: 5(-1.225,0) 5(1.225,0)
  rect 1.3x0.35 smd: 5(0,-1.725) 5(0,1.725)
  silkscreen extent -2.35,-2.25 1.75,2.25, body extent -1.5,-2 1.5,2, height 1.02
IND_0805 [mm] "Ferrite Bead"
  rect 1.3x1.5 smd mask+0.076: 1(0.95,0) 2(-0.95,0)
  silkscreen extent -1.83,-0.97 1.83,0.97, body extent -1,-0.63 1,0.62, height 0.5
LED_0805 [mm] "LED"
  rect 1.2x1.2 smd mask+0.076: A(0.889,0) K(-0.889,0)
  silkscreen extent -1.99,-0.89 1.73,0.89, body extent -1.01,-0.62 1.01,0.63, height 1.1
LQFP-48_19.6_393_58X11_SMD [mm] "48LQFP"
  rect 1.7x0.3 smd mask+0.076: 1(-4.238,2.75) 2(-4.238,2.25) 3(-4.238,1.75) 4(-4.238,1.25) 5(-4.238,0.75) 6(-4.238,0.25) 7(-4.238,-0.25) 8(-4.238,-0.75) 9(-4.238,-1.25) 10(-4.238,-1.75) 11(-4.238,-2.25) 12(-4.238,-2.75) 25(4.238,-2.75) 26(4.238,-2.25) 27(4.238,-1.75) 28(4.238,-1.25) 29(4.238,-0.75) 30(4.238,-0.25) 31(4.238,0.25) 32(4.238,0.75) 33(4.238,1.25) 34(4.238,1.75) 35(4.238,2.25) 36(4.238,2.75)
  rect 0.3x1.7 smd mask+0.076: 13(-2.75,-4.238) 14(-2.25,-4.238) 15(-1.75,-4.238) 16(-1.25,-4.238) 17(-0.75,-4.238) 18(-0.25,-4.238) 19(0.25,-4.238) 20(0.75,-4.238) 21(1.25,-4.238) 22(1.75,-4.238) 23(2.25,-4.238) 24(2.75,-4.238) 37(2.75,4.238) 38(2.25,4.238) 39(1.75,4.238) 40(1.25,4.238) 41(0.75,4.238) 42(0.25,4.238) 43(-0.25,4.238) 44(-0.75,4.238) 45(-1.25,4.238) 46(-1.75,4.238) 47(-2.25,4.238) 48(-2.75,4.238)
  silkscreen extent -3.72,-3.15 3.15,3.72, body extent -4.5,-4.5 4.5,4.5, height 1.7
MOUNTING [mm] "MH"
  round 6 hole 3.5: 1(0,0)
  silkscreen extent -3.3,-3.3 3.3,3.3, body extent -3,-2.75 3,2.75, height 4.24
QFN40_19_284_33X9_SMD [mm]
  rrect48% 0.84x0.25 smd: 1(-2.935,2.25) 2(-2.935,1.75) 3(-2.935,1.25) 4(-2.935,0.75) 5(-2.935,0.25) 6(-2.935,-0.25) 7(-2.935,-0.75) 8(-2.935,-1.25) 9(-2.935,-1.75) 10(-2.935,-2.25) 21(2.935,-2.25) 22(2.935,-1.75) 23(2.935,-1.25) 24(2.935,-0.75) 25(2.935,-0.25) 26(2.935,0.25) 27(2.935,0.75) 28(2.935,1.25) 29(2.935,1.75) 30(2.935,2.25)
  rrect48% 0.25x0.84 smd: 11(-2.25,-2.935) 12(-1.75,-2.935) 13(-1.25,-2.935) 14(-0.75,-2.935) 15(-0.25,-2.935) 16(0.25,-2.935) 17(0.75,-2.935) 18(1.25,-2.935) 19(1.75,-2.935) 20(2.25,-2.935) 31(2.25,2.935) 32(1.75,2.935) 33(1.25,2.935) 34(0.75,2.935) 35(0.25,2.935) 36(-0.25,2.935) 37(-0.75,2.935) 38(-1.25,2.935) 39(-1.75,2.935) 40(-2.25,2.935)
  rect 4.1x4.1 smd paste-3: 41(0,0)
  silkscreen extent -4.1,-3.61 3.61,3.61, body extent -3.07,-3 3.07,3.15, height 1.06
QFN100_19.6_669_58X10_SMD [mm] "CASE: QFN"
  rect 1.475x0.254 smd mask+0.076: 1(-7.738,6.127) 2(-7.738,5.627) 3(-7.738,5.127) 4(-7.738,4.627) 5(-7.738,4.127) 6(-7.738,3.627) 7(-7.738,3.127) 8(-7.738,2.627) 9(-7.738,2.127) 10(-7.738,1.627) 11(-7.738,1.127) 12(-7.738,0.627) 13(-7.738,0.127) 14(-7.738,-0.373) 15(-7.738,-0.873) 16(-7.738,-1.373) 17(-7.738,-1.873) 18(-7.738,-2.373) 19(-7.738,-2.873) 20(-7.738,-3.373) 21(-7.738,-3.873) 22(-7.738,-4.373) 23(-7.738,-4.873) 24(-7.738,-5.373) 25(-7.738,-5.873) 51(7.738,-5.873) 52(7.738,-5.373) 53(7.738,-4.873) 54(7.738,-4.373) 55(7.738,-3.873) 56(7.738,-3.373) 57(7.738,-2.873) 58(7.738,-2.373) 59(7.738,-1.873) 60(7.738,-1.373) 61(7.738,-0.873) 62(7.738,-0.373) 63(7.738,0.127) 64(7.738,0.627) 65(7.738,1.127) 66(7.738,1.627) 67(7.738,2.127) 68(7.738,2.627) 69(7.738,3.127) 70(7.738,3.627) 71(7.738,4.127) 72(7.738,4.627) 73(7.738,5.127) 74(7.738,5.627) 75(7.738,6.127)
  rect 0.254x1.475 smd mask+0.076: 26(-6,-7.611) 27(-5.5,-7.611) 28(-5,-7.611) 29(-4.5,-7.611) 30(-4,-7.611) 31(-3.5,-7.611) 32(-3,-7.611) 33(-2.5,-7.611) 34(-2,-7.611) 35(-1.5,-7.611) 36(-1,-7.611) 37(-0.5,-7.611) 38(0,-7.611) 39(0.5,-7.611) 40(1,-7.611) 41(1.5,-7.611) 42(2,-7.611) 43(2.5,-7.611) 44(3,-7.611) 45(3.5,-7.611) 46(4,-7.611) 47(4.5,-7.611) 48(5,-7.611) 49(5.5,-7.611) 50(6,-7.611) 76(6,7.865) 77(5.5,7.865) 78(5,7.865) 79(4.5,7.865) 80(4,7.865) 81(3.5,7.865) 82(3,7.865) 83(2.5,7.865) 84(2,7.865) 85(1.5,7.865) 86(1,7.865) 87(0.5,7.865) 88(0,7.865) 89(-0.5,7.865) 90(-1,7.865) 91(-1.5,7.865) 92(-2,7.865) 93(-2.5,7.865) 94(-3,7.865) 95(-3.5,7.865) 96(-4,7.865) 97(-4.5,7.865) 98(-5,7.865) 99(-5.5,7.865) 100(-6,7.865)
  silkscreen extent -6.65,-6.52 6.65,6.78, body extent -8,-8 8,8.13, height 1.6
RES_0603 [mil] "CASE: 0603"
  rect 35x35 smd mask+3: 1(-27.5,0) 2(27.5,0)
  silkscreen extent -53,-26 54,26, body extent -31,-16 31,16, height 18
RES_0805 [mm] "Resister"
  rect 1.3x1.5 smd mask+0.076: 1(0.95,0) 2(-0.95,0)
  silkscreen extent -1.83,-0.97 1.83,0.97, body extent -1,-0.63 1,0.62, height 0.5
RES_1206 [mm] "CASE: 1206"
  rect 1.35x1.75 smd: 1(1.5,0) 2(-1.5,0)
  silkscreen extent -2.44,-1.15 2.46,1.11, body extent -1.55,-0.77 1.55,0.78, height 0.55
RES_2512 [mil] "CASE: 2512"
  rect 80x125 smd: 1(-125,0) 2(125,0)
  silkscreen extent -178,-74 177,74, body extent -139,-60 136,61, height 19
SOIC16_50_284_25X90_SMT [mm]
  oval 2.5x0.635 smd mask+0.076: 1(-3.25,4.42)
  rect 2.5x0.635 smd mask+0.076: 2(-3.25,3.15) 3(-3.25,1.88) 4(-3.25,0.61) 5(-3.25,-0.66) 6(-3.25,-1.93) 7(-3.25,-3.2) 8(-3.25,-4.47) 9(3.25,-4.47) 10(3.25,-3.2) 11(3.25,-1.93) 12(3.25,-0.66) 13(3.25,0.61) 14(3.25,1.88) 15(3.25,3.15) 16(3.25,4.42)
  silkscreen extent -3.07,-5.3 2.26,5.44, body extent -3.02,-4.97 2.98,4.93, height 1.4
SOT223_3 [mm] "CASE: SOT223"
  rect 2.4x1 smd: 1(-2.875,2.275) 2(-2.875,-0.025) 3(-2.875,-2.325)
  rect 2.4x3.3 smd: 4(2.925,-0.025)
  silkscreen extent -3,-3.38 1.43,3.45, body extent -3.73,-3.28 3.27,3.22, height 1.7
SW_342_SMD [mm] "CASE: SMD"
  rect 2x2 smd: 1(0,0)
  rect 2.15x2.15 smd: 2(-8.5,0)
  silkscreen extent -10.25,-2.06 1.75,2, body extent -7.17,-1.79 -1.17,1.71, height 2.4
TSSOP16_25-59_294_54X14_SMT [mm] "TSOP, 16-Leads, Body 5.00x4.40mm, Pitch 0.65mm"
  oval 1.5x0.45 smd mask+0.076: 1(-2.908,2.273)
  rect 1.5x0.45 smd mask+0.076: 2(-2.908,1.623) 3(-2.908,0.973) 4(-2.908,0.323) 5(-2.908,-0.327) 6(-2.908,-0.977) 7(-2.908,-1.627) 8(-2.908,-2.277) 9(2.942,-2.277) 10(2.942,-1.627) 11(2.942,-0.977) 12(2.942,-0.327) 13(2.942,0.323) 14(2.942,0.973) 15(2.942,1.623) 16(2.942,2.273)
  silkscreen extent -2.97,-2.81 2.51,3.35, body extent -3.2,-2.55 3.2,2.55, height 1.2
VFQFN24_19.6_196_12X32_SMD_1 [mm] "CASE: VQFN24"
  rect 1.5x0.3 smd mask+0.076: 1(-1.25,3.25) 2(-1.25,2.75) 3(-1.25,2.25) 4(-1.25,1.75) 5(-1.25,1.25) 6(-1.25,0.75) 13(3.75,0.75) 14(3.754,1.25) 15(3.754,1.75) 16(3.754,2.25) 17(3.754,2.75) 18(3.754,3.25)
  rect 0.3x1.5 smd mask+0.076: 7(0,-0.5) 8(0.5,-0.5) 9(1,-0.5) 10(1.5,-0.5) 11(2,-0.5) 12(2.5,-0.5) 19(2.5,4.5) 20(2,4.5) 21(1.5,4.5) 22(1,4.5) 23(0.5,4.5) 24(0,4.5)
  rect 2.3x2.3 smd mask+0.076: 25(1.25,2)
  silkscreen extent -1.27,-0.05 3.35,4.37, body extent -0.8,-0.05 3.3,4.05, height 1
VQFN32_19_218_23X9_SMD [mm]
  rrect25% 0.6x0.25 smd mask+0: 1(-2.4,1.75) 2(-2.4,1.25) 3(-2.4,0.75) 4(-2.4,0.25) 5(-2.4,-0.25) 6(-2.4,-0.75) 7(-2.4,-1.25) 8(-2.4,-1.75) 17(2.4,-1.75) 18(2.4,-1.25) 19(2.4,-0.75) 20(2.4,-0.25) 21(2.4,0.25) 22(2.4,0.75) 23(2.4,1.25) 24(2.4,1.75)
  rrect25% 0.25x0.6 smd mask+0: 9(-1.75,-2.4) 10(-1.25,-2.4) 11(-0.75,-2.4) 12(-0.25,-2.4) 13(0.25,-2.4) 14(0.75,-2.4) 15(1.25,-2.4) 16(1.75,-2.4) 25(1.75,2.4) 26(1.25,2.4) 27(0.75,2.4) 28(0.25,2.4) 29(-0.25,2.4) 30(-0.75,2.4) 31(-1.25,2.4) 32(-1.75,2.4)
  rect 3.45x3.45 smd paste-3 mask+0: 33(0,0)
  silkscreen extent -3.39,-2.95 2.95,2.95, body extent -2.56,-2.56 2.56,2.56, height 1.01
XTAL_314_240X47_SMD [mm] "CASE: TH"
  rect 6.096x1.2 smd: 1(0,0) 2(8,0)
  silkscreen extent -3.29,-2.44 11.32,2.57, body extent -2.99,-2.27 10.9,2.41, height 3.05

## Part data
32 D5 D6 D7: library part DIO-T_3.3V-8.8V-SOD923, "8.8V Clamp 5A (8/20µs) Ipp Tvs Diode Surface Mount SOD-923", Alternate Part Number-1=NA, Case/Package=SOD923, Manufacturer="Micro Commercial Co", Supplier Part Number-1="ESD3V3D9-TPMSCT-ND - Cut Tape (CT)", Manufacturer Part Number=ESD3V3D9-TP, Supplier-1=Digikey
C1 C2 C3 C40: library part CAP-P_100uF-50V-20%-RAD, "100µF 50V Aluminum Polymer Capacitor Radial, Can - SMD 28mOhm 4000 Hrs @ 125°C", Alternate Part Number-1=VEU101M1HTR-1010, Case/Package=Radial-SMD, Manufacturer=Nichicon, Manufacturer Part Number=GYA1H101MCQ1GS, Supplier Part Number-1=GYA1H101MCQ1GS, Supplier-1="SP ROAD"
C4 C9 C10 C15 C29 C32 C38 C41 C44 C46 C47 C50 C51 C56 C57 C61 C65 C68 C69 C70 C75 C79 C80 C81 C82 C83 C88 C89 C90 C91 C92: library part CAP_0.1uF-50V-10%-0805, "0.1µF ±10% 50V Ceramic Capacitor X7R 0805 (2012 Metric)", Alternate Part Number-1=NA, Case/Package=0805, Manufacturer=Samsung, Manufacturer Part Number=CL21B104KBCNNNC, Supplier Part Number-1=0805B104K500CT, Supplier-1=SIRICOM
C5 C8 C11 C14 C22 C28 C33 C39 C42 C43 C45 C48 C49 C58 C60 C63 C64 C67 C73 C86 C87: library part CAP_1uF-50V-5%-0805, "1µF ±5% 50V Ceramic Capacitor X7R 0805 (2012 Metric)", Alternate Part Number-1=0805F105M500NT, Case/Package=0805, Manufacturer=Samsung, Manufacturer Part Number=CC0805JKX7R9BB105, Supplier Part Number-1=CL21B105KBFNNNE, Supplier-1=SIRICOM
C6 C7 C12 C13 C27 C34 C66 C74: library part CAP_10uF-50V-10%-1206, "10µF ±10% 50V Ceramic Capacitor X7R 1206 (3216 Metric)", Alternate Part Number-1=GRT31CR61H106ME01L, Case/Package=1206, Manufacturer=KEMET, Manufacturer Part Number=CL31B106KBHNNNE, Supplier Part Number-1=CC1206KKX5R9BB106, Supplier-1=SIRICOM
C16 C78: library part CAP_4.7uF-50V-10%-0805, "4.7µF ±10% 50V Ceramic Capacitor X5R 0805 (2012 Metric)", Alternate Part Number-1=NA, Case/Package=0805, Manufacturer=Yageo, Manufacturer Part Number=GRM21BR61H475KE51L, Supplier Part Number-1=CL21A475KBQNNNE, Supplier-1=SIRICOM
C17 C19 C20 C24 C37: library part CAP_0.1uF-50V-5%-0805, "0.1µF ±5% 50V Ceramic Capacitor X7R 0805 (2012 Metric)", Alternate Part Number-1=0805B104M500, Case/Package=0805, Manufacturer="AVX Corporation", Manufacturer Part Number=08055C104JAT4A, Supplier Part Number-1=0805B104J500CT, Supplier-1=SIRICOM
C18 C21 C76 C77: library part CAP_30pF-50V-10%-0805, "±10% 50V Ceramic Capacitor C0G, NP0 0805 (2012 Metric)", Alternate Part Number=NA, Case/Package=0805, Manufacturer=KEMET, Manufacturer Part Number=C0805C300K5GAC7800, Supplier Part Number-1="399-17443-1-ND - Cut Tape (CT)", Supplier-1=Digikey
C23 C30 C31 C53 C54: library part CAP_10nF-50V-10%-0805, "10000pF ±10% 50V Ceramic Capacitor X7R 0805 (2012 Metric)", Alternate Part Number-1=GRM2195C1H103JA01D, Case/Package=0805, Manufacturer=Samsung, Manufacturer Part Number=C0805C103K5RECAUTO, Supplier Part Number-1=0805B103K500CT, Supplier-1=SIRICOM
C25: library part CAP_10nF-1KV-10%-RAD-TH, "10000pF ±10% 1000V (1kV) Ceramic Capacitor X7R Radial", Alternate Part Number-1=NA, Case/Package=TH, Manufacturer=Yageo, Manufacturer Part Number=RDER73A103K2K1H03B, Supplier Part Number-1=RDER73A103K2K1H03B, Supplier-1="SP ROAD"
C26: library part CAP_2nF-50V-10%-0805, "2000pF ±10% 50V Ceramic Capacitor X7R 0805 (2012 Metric)", Alternate Part Number-1=NA, Case/Package=0805, Manufacturer="Samsung Electro-Mechanics", Manufacturer Part Number=CL21B202KBANNNC, Supplier Part Number-1="1276-2471-1-ND - Cut Tape (CT)", Supplier-1=Digikey
C35 C36: library part CAP_20pF-50V-10%-0805, "±10% 50V Ceramic Capacitor C0G, NP0 0805 (2012 Metric)", Alternate Part Number-1=NA, Case/Package=0805, Manufacturer="AVX Corporation", Manufacturer Part Number=08055A200KAT2A, Supplier Part Number-1="478-11887-1-ND - Cut Tape (CT)", Supplier-1=Digikey
C52: library part CAP_0.1uF-50V-20%-0805, "0.1µF ±20% 50V Ceramic Capacitor X7R 0805 (2012 Metric)", Alternate Part Number-1=NA, Case/Package=0805, Manufacturer="Samsung Electro-Mechanics", Manufacturer Part Number=CL21B104MBCNNNC, Supplier Part Number-1=0805B104K500CT, Supplier-1=SIRICOM
C59 C62: library part CAP_22nF-50V-10%-0805, "0.022µF ±10% 50V Ceramic Capacitor X7R 0805 (2012 Metric)", Alternate Part Number-1=NA, Case/Package=0805, Manufacturer="Samsung Electro-Mechanics", Manufacturer Part Number=CL21B223KBANNNC, Supplier Part Number-1="1276-1081-1-ND - Cut Tape (CT)", Supplier-1=Digikey
C71 C72: library part CAP_150pF-50V-10%-0805, "150pF ±10% 50V Ceramic Capacitor C0G, NP0 0805 (2012 Metric)", Alternate Part Number-1=NA, Case/Package=0805, Manufacturer="AVX Corporation", Manufacturer Part Number=08055A151KAT2A, Supplier Part Number-1="478-10501-1-ND - Cut Tape (CT)", Supplier-1=Digikey
C84 C85: library part CAP_2.2uF-25V-10%-0805, "2.2µF ±10% 25V Ceramic Capacitor X7R 0805 (2012 Metric)", Alternate Part Number-1=NA, Case/Package=0805, Manufacturer=KEMET, Manufacturer Part Number=CL21B225KAFNFNE, Supplier Part Number-1=CL21A225KAFNNNE, Supplier-1=SIRICOM
D1 D3: library part DIO-S_445mV-30V-2A-SMB, "Diode Schottky 30V 2A Surface Mount SMB", Alternate Part Number-1=NA, Case/Package=SMB, Manufacturer="ON Semiconductor", Manufacturer Part Number=MBRS130LT3G, Supplier Part Number-1=MBRS130LT3G, Supplier-1=ARROW
D2: library part DIO-Z_3.3V-500mW-SOD123, "Zener Diode 3.3V 500mW ±6% Surface Mount SOD-123", Alternate Part Number-1=NA, Case/Package=SOD-123, Manufacturer="Diodes Incorporated", Supplier Part Number-1=BZT52C3V3-FDICT-ND, Manufacturer Part Number=BZT52C3V3-7-F, Supplier-1=Digikey
D4: library part DIO-Z_1.8V-500mW-DO213AA, "Zener Diode 1.8V 500mW ±5% Surface Mount DO-213AA"
DS1 DS2: library part LED_RED-2V-20mA-0805, "Red 631nm LED Indication - Discrete 2V 0805 (2012 Metric)", Alternate Part Number-1=NA, Case/Package=0805, Manufacturer="Vishay Lite-On", Manufacturer Part Number=LTST-C171KRKT, Supplier Part Number-1=LTST-C171KRKT, Supplier-1="SP ROAD"
FB1 FB2 FB3 FB4: library part FB_1K-100MHZ-1.6A-0805, "1 kOhms @ 100MHz 1 Power Line Ferrite Bead 0805 (2012 Metric) 1.6A", Alternate Part Number-1=NA, Case/Package=0805, Manufacturer=Laird, Manufacturer Part Number=BLM21SP102SH1D, Supplier Part Number-1=ACMS201209A102, Supplier-1=SIRICOM
J1: library part CON-TB_3X1-100-ST-TH, "3 Pins, 1 Row 2.54mm Pitch, straight Connector, male", Alternate Part Number-1=NA, Case/Package=TH-CON, Manufacturer="Phoenix Contact", Manufacturer Part Number=1725669, Supplier Part Number-1=1725669, Supplier-1="SP ROAD"
J2 J5: library part CON_USB2.0-MINIB-SMD, "USB - mini B USB 2.0 Receptacle Connector 5 Position Surface Mount, Right Angle", Alternate Part Number-1=NA, Case/Package=USB-MINI-B, Manufacturer=EDAC, Manufacturer Part Number=690-005-299-043, Supplier Part Number-1=C105424, Supplier-1=LCSC
J3: library part CON-BS-SKT_6X1-100-ST-TH, "6 Pins, 1 Row 2.54mm Pitch, Straight bergstrip, Female", Alternate Part Number-1=NA, Case/Package=TH-CON, Manufacturer=Molex, Manufacturer Part Number=22-10-2061, Supplier Part Number-1=NA, Supplier-1="SP ROAD"
J4: library part CON-SKT-RJ_8C8P-RA-TH, "8 Pins, 2 Row 2.54mm Pitch, right angle Connector, male", Alternate Part Number-1=NA, Case/Package=TH-CON, Manufacturer=Assmann, Manufacturer Part Number=A-2004-2-4-LPS-N-R, Supplier Part Number-1=A-2004-2-4-LPS-N-R, Supplier-1="SP ROAD"
J6 J7: library part CON-PLG_2X1-100-ST-TH, "2 Pins, 1 Row 2.54mm Pitch, Straight Connector, male", Alternate Part Number-1=NA, Case/Package=TH-CON, Crimp Part Number=ASXHSXH22K51, Manufacturer=JST, Mating Part Number=XHP-2, Manufacturer Part Number=B2B-XH-A(LF)(SN), Supplier Part Number-1=B2B-XH-A(LF)(SN), Supplier-1="SP ROAD"
J9: library part CON-PLG-STEREO_4X1-100-RA-SMD, "2.50mm (0.094\", 3/32\", Sub Mini, Miniature) - Headphone Phone Jack Stereo (4 Conductor, TRRS) Connector Solder", Alternate Part Number-1=NA, Case/Package=SMD, Manufacturer="CUI Devices", Manufacturer Part Number=SJ-2504A-SMT-TR, Supplier Part Number-1="CP-SJ-2504A-SMT-CT-ND - Cut Tape (CT)", Supplier-1=Digikey
J10 J11: library part CON-PLG_4X1-100-ST-TH, "4 Pins, 1 Row 2.54mm Pitch, straight Connector, male", Alternate Part Number-1=NA, Case/Package=TH-CON, Crimp Part Number=ASXHSXH22K51, Manufacturer="Wurth Electronics", Mating Part Number=XHP-4, Manufacturer Part Number=B4B-XH-A(LF)(SN), Supplier Part Number-1=B4B-XH-A(LF)(SN), Supplier-1=LCSC
J11: library part CON-PLG_4X1-50-RA-TH, "4 Pins, 1 Row 1.25mm Pitch, right angle Connector, male", Alternate Part Number-1=NA, Case/Package=TH-CON, Crimp Part Number=653153128130, Manufacturer=JST, Manufacturer Part Number=653004117322, Mating Part Number=653004113322, Supplier Part Number-1=653004117322, Supplier-1=WURTH
J12: library part CON-BS-PLG_4X1-100-ST-TH, "4 Pins, 1 Row 2.54mm Pitch, Straight bergstrip, Male", Alternate Part Number-1=NA, Case/Package=TH-CON, Manufacturer=NA, Manufacturer Part Number=NA, Supplier Part Number-1=NA, Supplier-1="SP ROAD"
MH1 MH2 MH3 MH4: library part MH_3.5H_6D, Alternate Part Number-1=NA, Case/Package=TH, Manufacturer=NA, Manufacturer Part Number=NA, Supplier Part Number-1=NA, Supplier-1=NA
Q1 Q2: library part MOSFET-N_60V-14.8A-V-DFN5045-12, "Mosfet Array 4 N-Channel 14.8A (Ta) Surface Mount V-DFN5045-12", Alternate Part Number-1=DMHT3006LFJ-13, Case/Package=DFN5045-12, Manufacturer="ON Semiconductor", Supplier Part Number-1=C460986, Manufacturer Part Number=DMHT6016LFJ-13, Supplier-1=LCSC
R1 R3 R39 R46 R48: library part RES_100K-0.1W-1%-0603, "100 kOhms ±1% 0.1W, 1/10W Chip Resistor 0603 (1608 Metric) Automotive AEC-Q200 Thick Film", Alternate Part Number-1=NA, Case/Package=0603, Manufacturer="Stackpole Electronics", Manufacturer Part Number=RMCF0603FT100K, Supplier Part Number-1=RMCF0603FT100K, Supplier-1=Arrow
R2: library part RES_1.5K-0.125W-1%-0805, "1.5 kOhms ±1% 0.125W, 1/8W Chip Resistor 0805 (2012 Metric) Thick Film", Alternate Part Number-1=NA, Case/Package=0805, Manufacturer="TE Connectivity Passive Product", Manufacturer Part Number=CRG0805F1K5, Supplier Part Number-1=NA, Supplier-1=SIRICOM
R4 R7 R8 R9 R12 R15 R16 R17 R18 R21 R22 R23 R24 R27 R28 R29 R30 R33 R34 R35 R36 R37 R38 R42 R45 R47: library part RES_10K-0.1W-1%-0603, "10 kOhms ±1% 0.1W, 1/10W Chip Resistor 0603 (1608 Metric) Automotive AEC-Q200 Thick Film", Alternate Part Number-1=0603WAJ0103T5E, Case/Package=0603, Manufacturer=Walsin, Manufacturer Part Number=WR06X1002FTL, Supplier Part Number-1=WR06X1002FTL, Supplier-1=SIRICOM
R5 R6 R14 R26: library part RES_3.3K-0.1W-1%-0603, "3.3 kOhms ±1% 0.1W, 1/10W Chip Resistor 0603 (1608 Metric) Automotive AEC-Q200 Thick Film", Alternate Part Number-1=0603WAF3301T5E, Case/Package=0603, Manufacturer=Wilson, Manufacturer Part Number=WR06X3301FTL, Supplier Part Number-1=WR06X3301FTL, Supplier-1=SIRICOM
R10: library part RES_1M-0.25W-1%-1206, "1 MOhms ±1% 0.25W, 1/4W Chip Resistor 1206 (3216 Metric) Automotive AEC-Q200, High Voltage Thick Film", Alternate Part Number-1=NA, Case/Package=1206, Manufacturer=Walsin, Manufacturer Part Number=WR12X1004FTL, Supplier Part Number-1=WR12X1004FTL, Supplier-1=SIRICOM
R11: library part RES_6.49K-0.125W-1%-0805, "6.49 kOhms ±1% 0.125W, 1/8W Chip Resistor 0805 (2012 Metric) Moisture Resistant Thick Film", Alternate Part Number-1=NA, Case/Package=0805, Manufacturer="Stackpole Electronics", Manufacturer Part Number=RC0805FR-076K49L, Supplier Part Number-1=WRO8X6491FTL, Supplier-1=SIRICOM
R13 R25: library part RES_2.2K-0.1W-1%-0603, "2.2 kOhms ±1% 0.1W, 1/10W Chip Resistor 0603 (1608 Metric) Automotive AEC-Q200 Thick Film", Alternate Part Number-1=WR06X2201FTL, Case/Package=0603, Manufacturer=Walsin, Manufacturer Part Number=WR06X2201FTL, Supplier Part Number-1=WR06X2201FTL, Supplier-1=SIRICOM
R19 R31: library part RES_33K-0.125W-1%-0805, "Thick Film Resistors - SMD 33KOhms 1/8W 150V33 kOhms ±1% 0.125W, 1/8W Chip Resistor 0805 (2012 Metric) Thick Film", Alternate Part Number-1=NA, Case/Package=0805, Manufacturer="Vishay BCcomponents", Manufacturer Part Number=CRG0805F33K, Supplier Part Number-1=WR08X3302FTL, Supplier-1=SIRICOM
R20 R32: library part RES_50mOhm-2W-1%-2512, "50 mOhms ±1% 2W Chip Resistor 2512 (6432 Metric) Automotive AEC-Q200, Current Sense, Moisture Resistant Metal Element", Alternate Part Number-1=PMR100HZPFU5L00, Case/Package=2512, Manufacturer=Yageo, Manufacturer Part Number=PA2512FKF7W0R05E, Supplier Part Number-1=LR2512-22R060F1, Supplier-1=SIRICOM
R40 R41: library part RES_1K-0.1W-1%-0603, "1 kOhms ±1% 0.1W, 1/10W Chip Resistor 0603 (1608 Metric) Automotive AEC-Q200 Thick Film", Alternate Part Number-1=0603WAF1001T5E, Case/Package=0603, Manufacturer=Walsin, Manufacturer Part Number=WR06X1001FTL, Supplier Part Number-1=WR06X1001FTL, Supplier-1=SIRICOM
R43 R44: library part RES_51.1R-0.1W-1%-0603, "51.1 Ohms ±1% 0.1W, 1/10W Chip Resistor 0603 (1608 Metric) Thick Film", Alternate Part Number-1=NA, Case/Package=0603, Manufacturer="Vishay Dale", Manufacturer Part Number=CRCW060351R1FKEAC, Supplier Part Number-1="541-5468-1-ND - Cut Tape (CT)", Supplier-1=Digikey
SW1 SW2 SW3: library part SW1_RS-282G05A3-SMRT-SMD, "Tactile Switch SPST-NO Top Actuated Surface Mount", Alternate Part Number-1=NA, Case/Package=SMD, Manufacturer="ITT C&K", Manufacturer Part Number=RS-282G05A3-SMRT, Supplier Part Number-1=RS-282G05A3-SMRT, Supplier-1="SP ROAD"
U1 U2: library part REG_15V-3.3V-0.9A-12W-SOT223, "Linear Voltage Regulator IC 1 Output 800mA SOT-223", Alternate Part Number-1=NA, Case/Package=SOT223, Manufacturer=STMicroelectronics, Manufacturer Part Number=LD1117S33CTR, Supplier Part Number-1=LD1117S33CTR, Supplier-1="SP ROAD"
U3: library part IC_STM32F103C8T6, "ARM® Cortex®-M3 STM32F1 Microcontroller IC 32-Bit 72MHz 64KB (64K x 8) FLASH 48-LQFP (7x7)", Alternate Part Number-1=NA, Case/Package=LQFP48, Manufacturer=STMicroelectronics, Manufacturer Part Number=STM32F103C8T6, Supplier Part Number-1=STM32F103C8T6, Supplier-1=LCSC
U4: library part IC_DP83826IRHBR, "Ethernet ICs Low latency 10/100-Mbps PHY, MII interface and enhanced mode with an industrial temperature range 32-VQFN -40 to 85", Alternate Part Number-1=NA, Case/Package=32-VQFN, Manufacturer="Texas Instruments", Supplier Part Number-1=595-DP83826IRHBR, Manufacturer Part Number=DP83826IRHBR, Supplier-1=Mouser
U5: library part IC_CH340C, "USB Bridge, USB to UART USB 2.0 UART Interface", Alternate Part Number-1=NA, Case/Package=SOIC16, Manufacturer=Olimex, Supplier Part Number-1=C84681, Manufacturer Part Number=CH340C, Supplier-1=LCSC
U6 U7: library part IC_DRV8701ERGET, "Motor Driver Power MOSFET Parallel 24-VQFN (4x4)", Alternate Part Number-1=NA, Case/Package=VFQFN24, Manufacturer="Texas Instruments", Manufacturer Part Number=DRV8701ERGET, Supplier Part Number-1=DRV8701ERGET, Supplier-1=ARROW
U8: library part IC_ADS122C04IPW, "24 Bit Analog to Digital Converter 4 Input 1 Sigma-Delta 16-TSSOP", Alternate Part Number-1=NA, Case/Package=TSSOP16, Manufacturer="Texas Instruments", Manufacturer Part Number=ADS122C04IPW, Supplier Part Number-1=ADS122C04IPW, Supplier-1=MOUSER
U9: library part IC_CS43L22, "Audio D/A Converter ICs Low Power Stereo DAC w/ClassD Spkr Driver", Alternate Part Number-1=NA, Case/Package=QFN-40, Manufacturer="Cirrus Logic", Supplier Part Number-1=777-CS43L22-CNZ, Manufacturer Part Number=CS43L22-CNZ, Supplier-1=Mouser
U10: library part IC_IMP34DT05TR, "MEMS Microphones AUTO & INDUSTRIAL SENSORS", Alternate Part Number-1=NA, Case/Package=HCLGA-4, Manufacturer=STMicroelectronics, Supplier Part Number-1=511-IMP34DT05TR, Manufacturer Part Number=IMP34DT05TR, Supplier-1=Mouser
U11: library part IC_STM32F407VGT6, "ARM® Cortex®-M4 STM32F4 Microcontroller IC 32-Bit 168MHz 1MB (1M x 8) FLASH 100-LQFP (14x14)", Alternate Part Number-1=STM32F407VET6, Case/Package=LQFP100, Manufacturer=STMicroelectronics, Manufacturer Part Number=STM32F407VGT6, Supplier Part Number-1=STM32F407VGT6, Supplier-1=ARROW
X1 X2: library part XTAL_8MHZ-ECS-80-32-5PX-SMD, "8MHz ±30ppm Crystal 32pF 60 Ohms HC-49/US", Alternate Part Number-1=NA, Case/Package=SMD/SMT, Manufacturer="Fox Electronics", Manufacturer Part Number=ECS-80-32-5PX-TR, Supplier Part Number-1=ECS-80-32-5PX-TR, Supplier-1="SP ROAD"
Y2: library part XTAL_25Mhz-FOXSDLF/250F-20, "25MHz ±30ppm Crystal 20pF 30 Ohms HC-49/US", Alternate Part Number-1=NA, Case/Package=SMD, Manufacturer=Abracon, Manufacturer Part Number=FOXSDLF/250F-20, Supplier Part Number-1=FOXSDLF/250F-20, Supplier-1=MOUSER

## Via types
v1: diameter 0.8, hole 0.4, Top Layer to Bottom Layer, 257 vias
v2: diameter 0.45, hole 0.25, Top Layer to Bottom Layer, 149 vias

## Nets (pads, with @x,y where several pads share a name; then routed paths per layer and width w, separated by ;. In a path a pad name is that pad's centre, name@x,y a point inside that pad or via, vN(x,y) a via of type N, cw(c..) or ccw(c..) an arc to the next point about the centre after c; other vN are vias at no path point)
+1V8: C10.2 C11.2 C12.2 C60.2 C61.2 D4.K FB3.1 U2.2 U2.4 U9.34 | length 3.4
  Top Layer w0.3: v1(37.701,52.825) 37.837,52.825 38.032,52.629 38.619,52.629 38.825,52.423 38.825,52.305 U9.34@38.925,52.205
  Bottom Layer w0.5: C61.2@38.4,51.1 C60.2@40.3,51.1
  other v1: 70.6,26.7 71.8,26.8 69.4,27 71.2,27.7 72.3,27.7